# Altium PCB PCB.PcbDoc (part 1 of 3)
Units mm, origin at the board's own origin, x right, y up, seen from the top; angles counter-clockwise.
Board outline 82.04 x 50.04 mm, 4 copper layers (Top Layer, Layer 1, Layer 2, Bottom Layer), stack 1.604 mm thick; 179 components, 140 nets, 1023 pads, 520 vias.
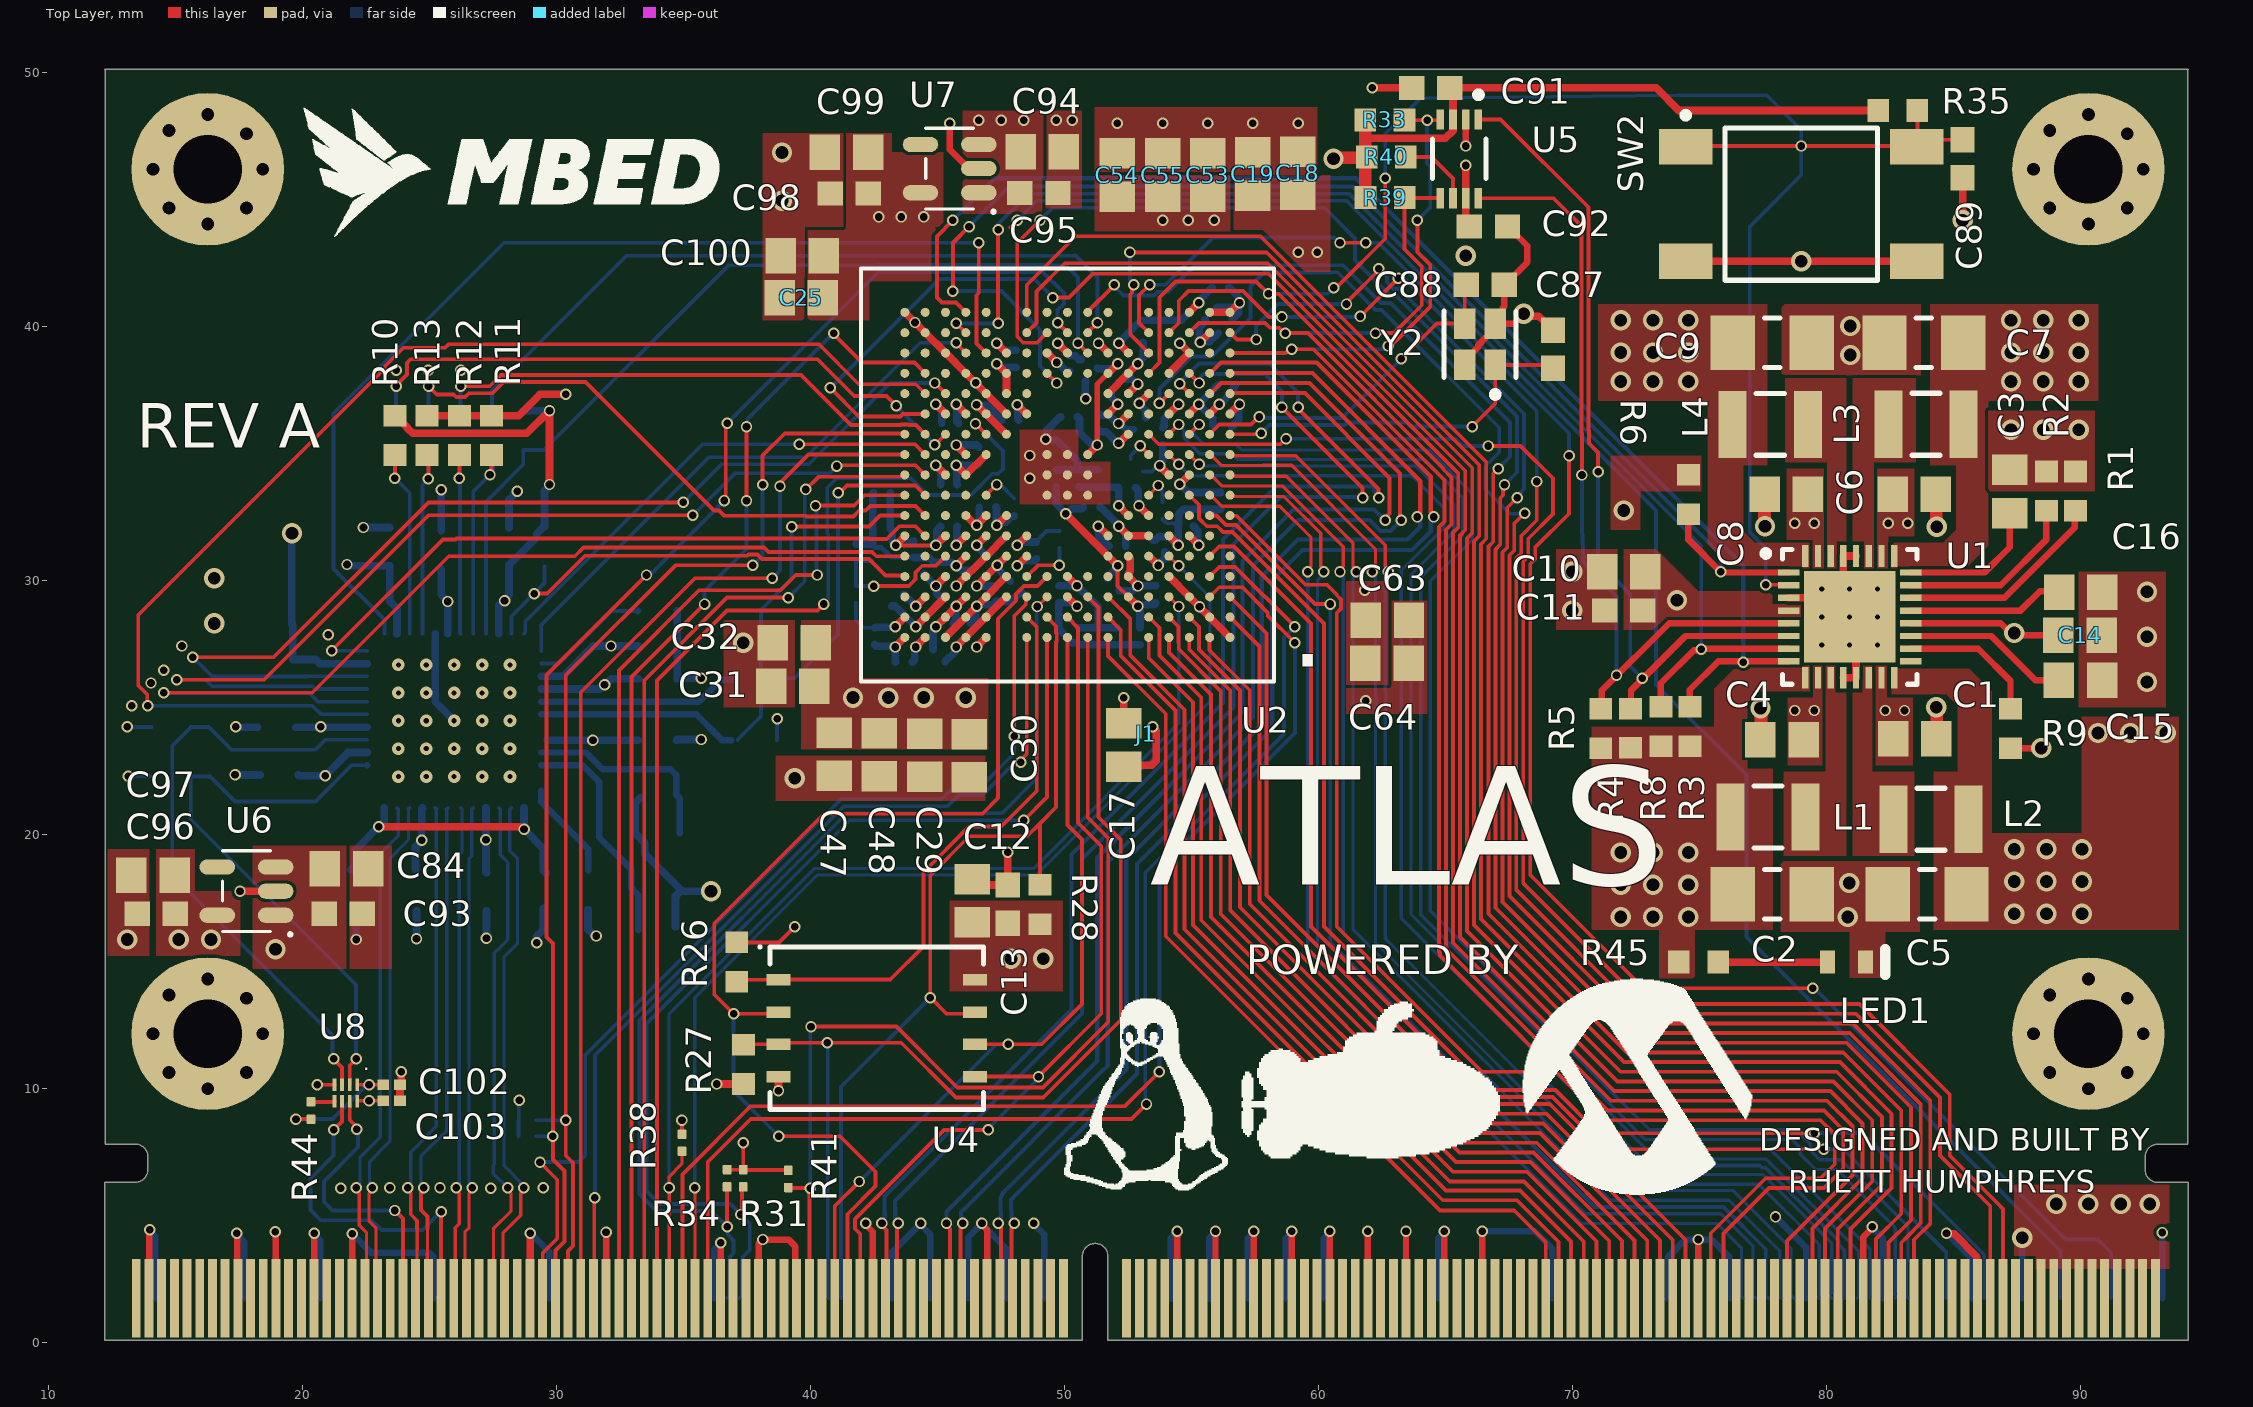
[diagram p0: Top Layer view]
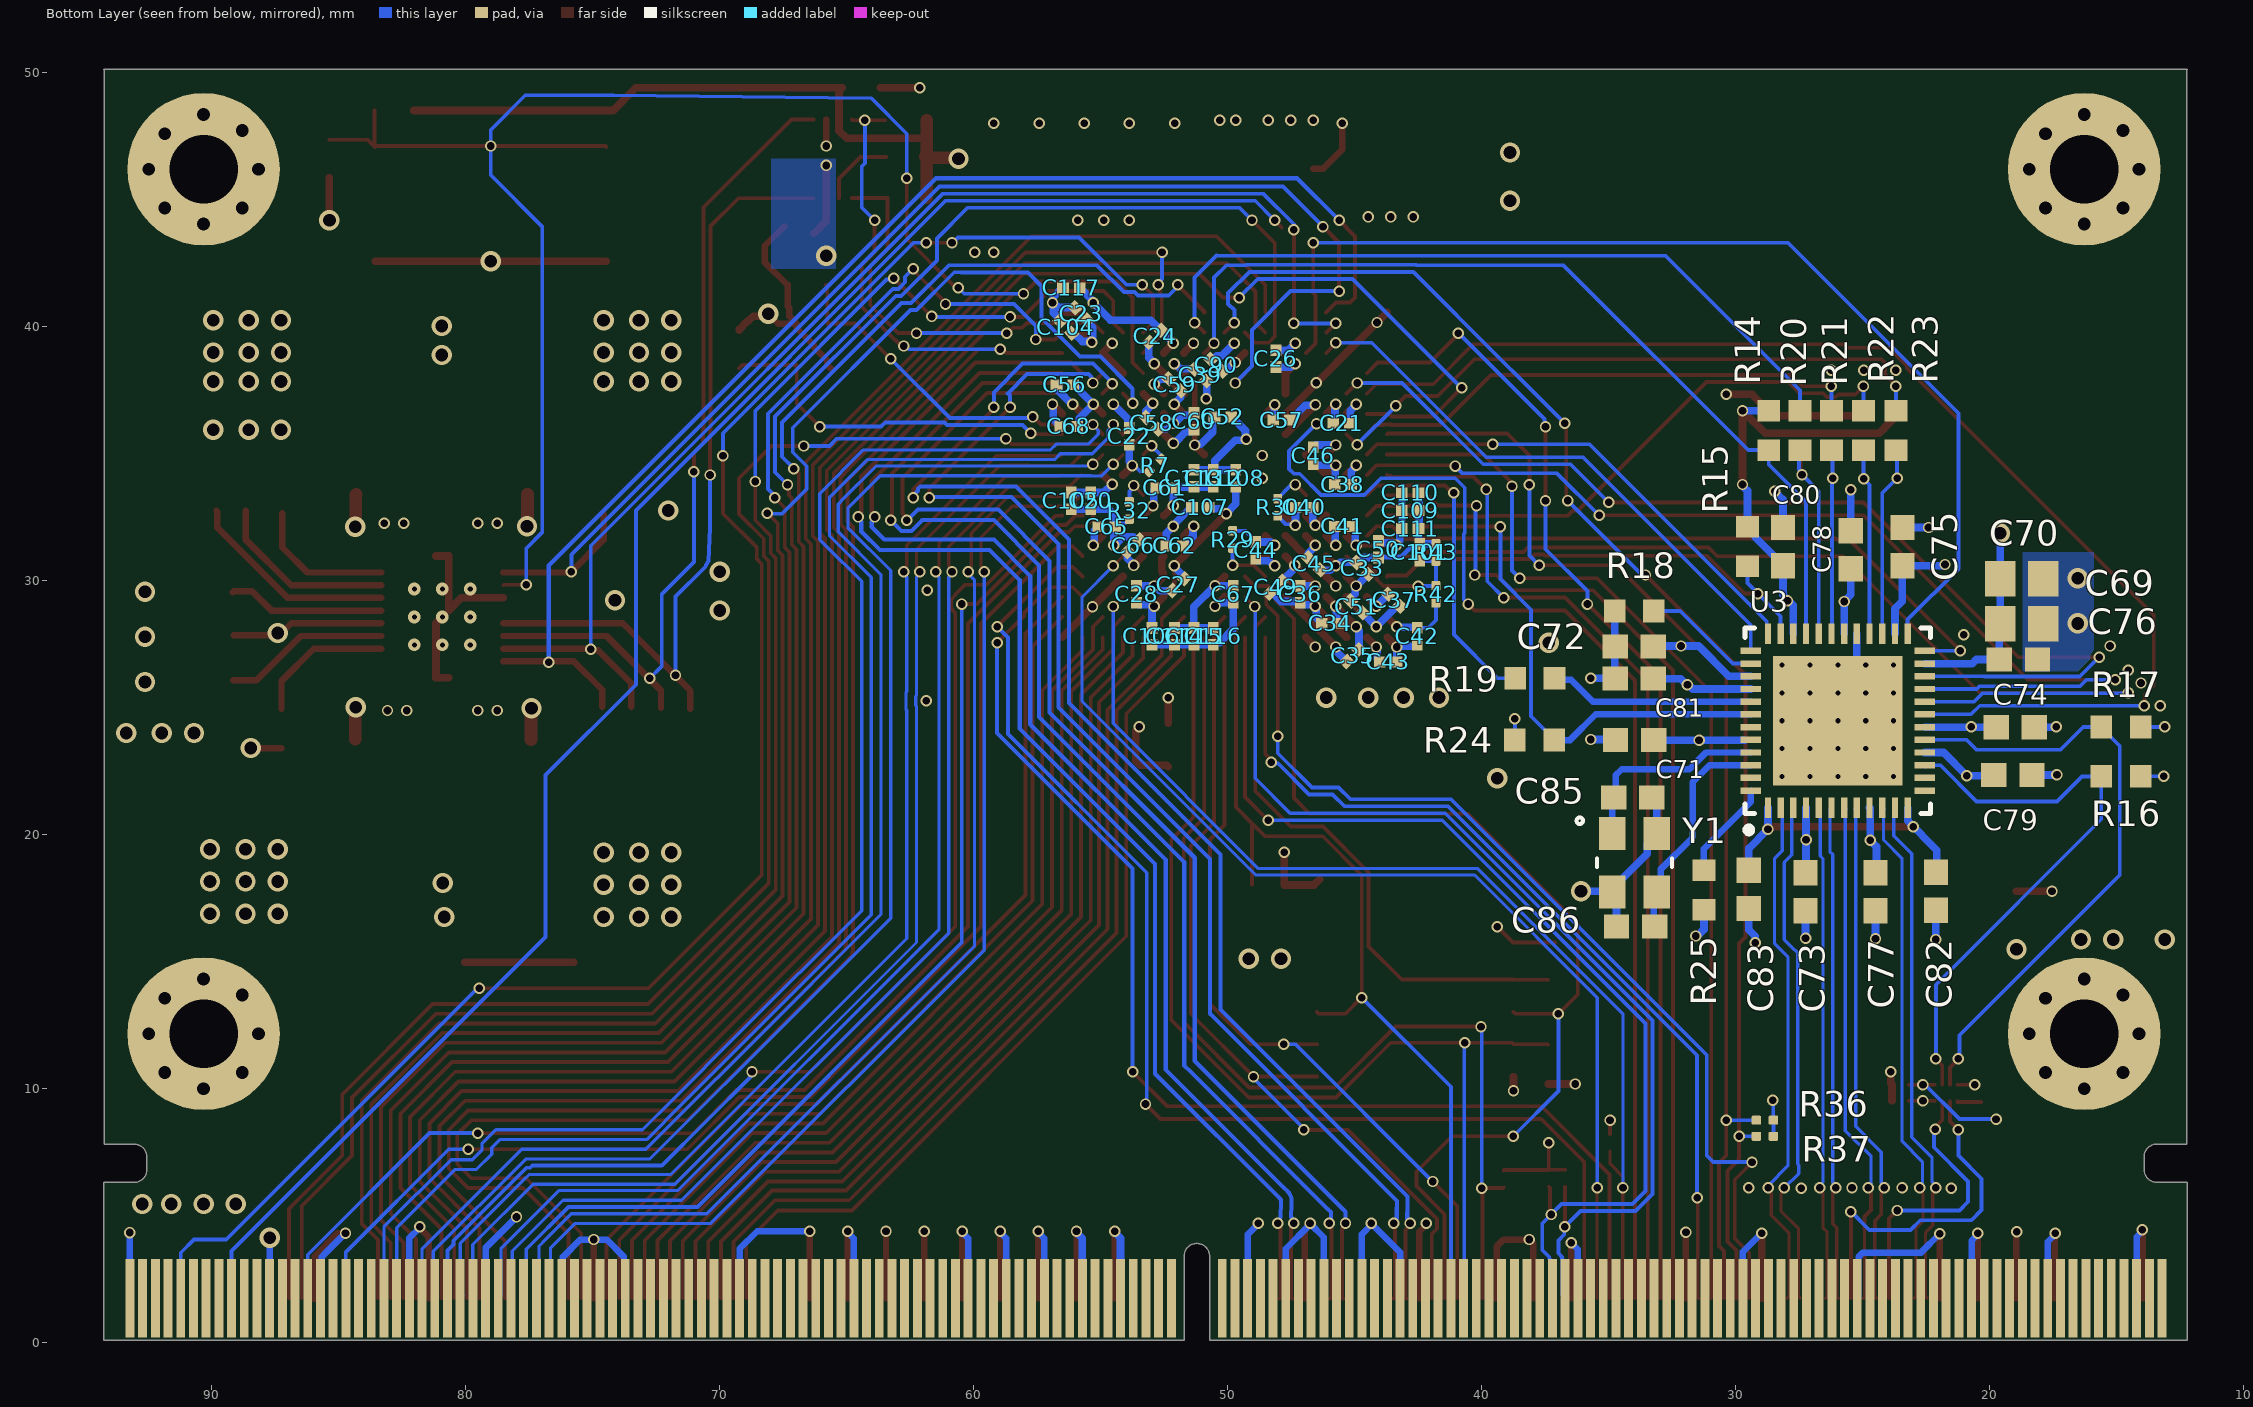
[diagram p1: Bottom Layer view, seen from below]
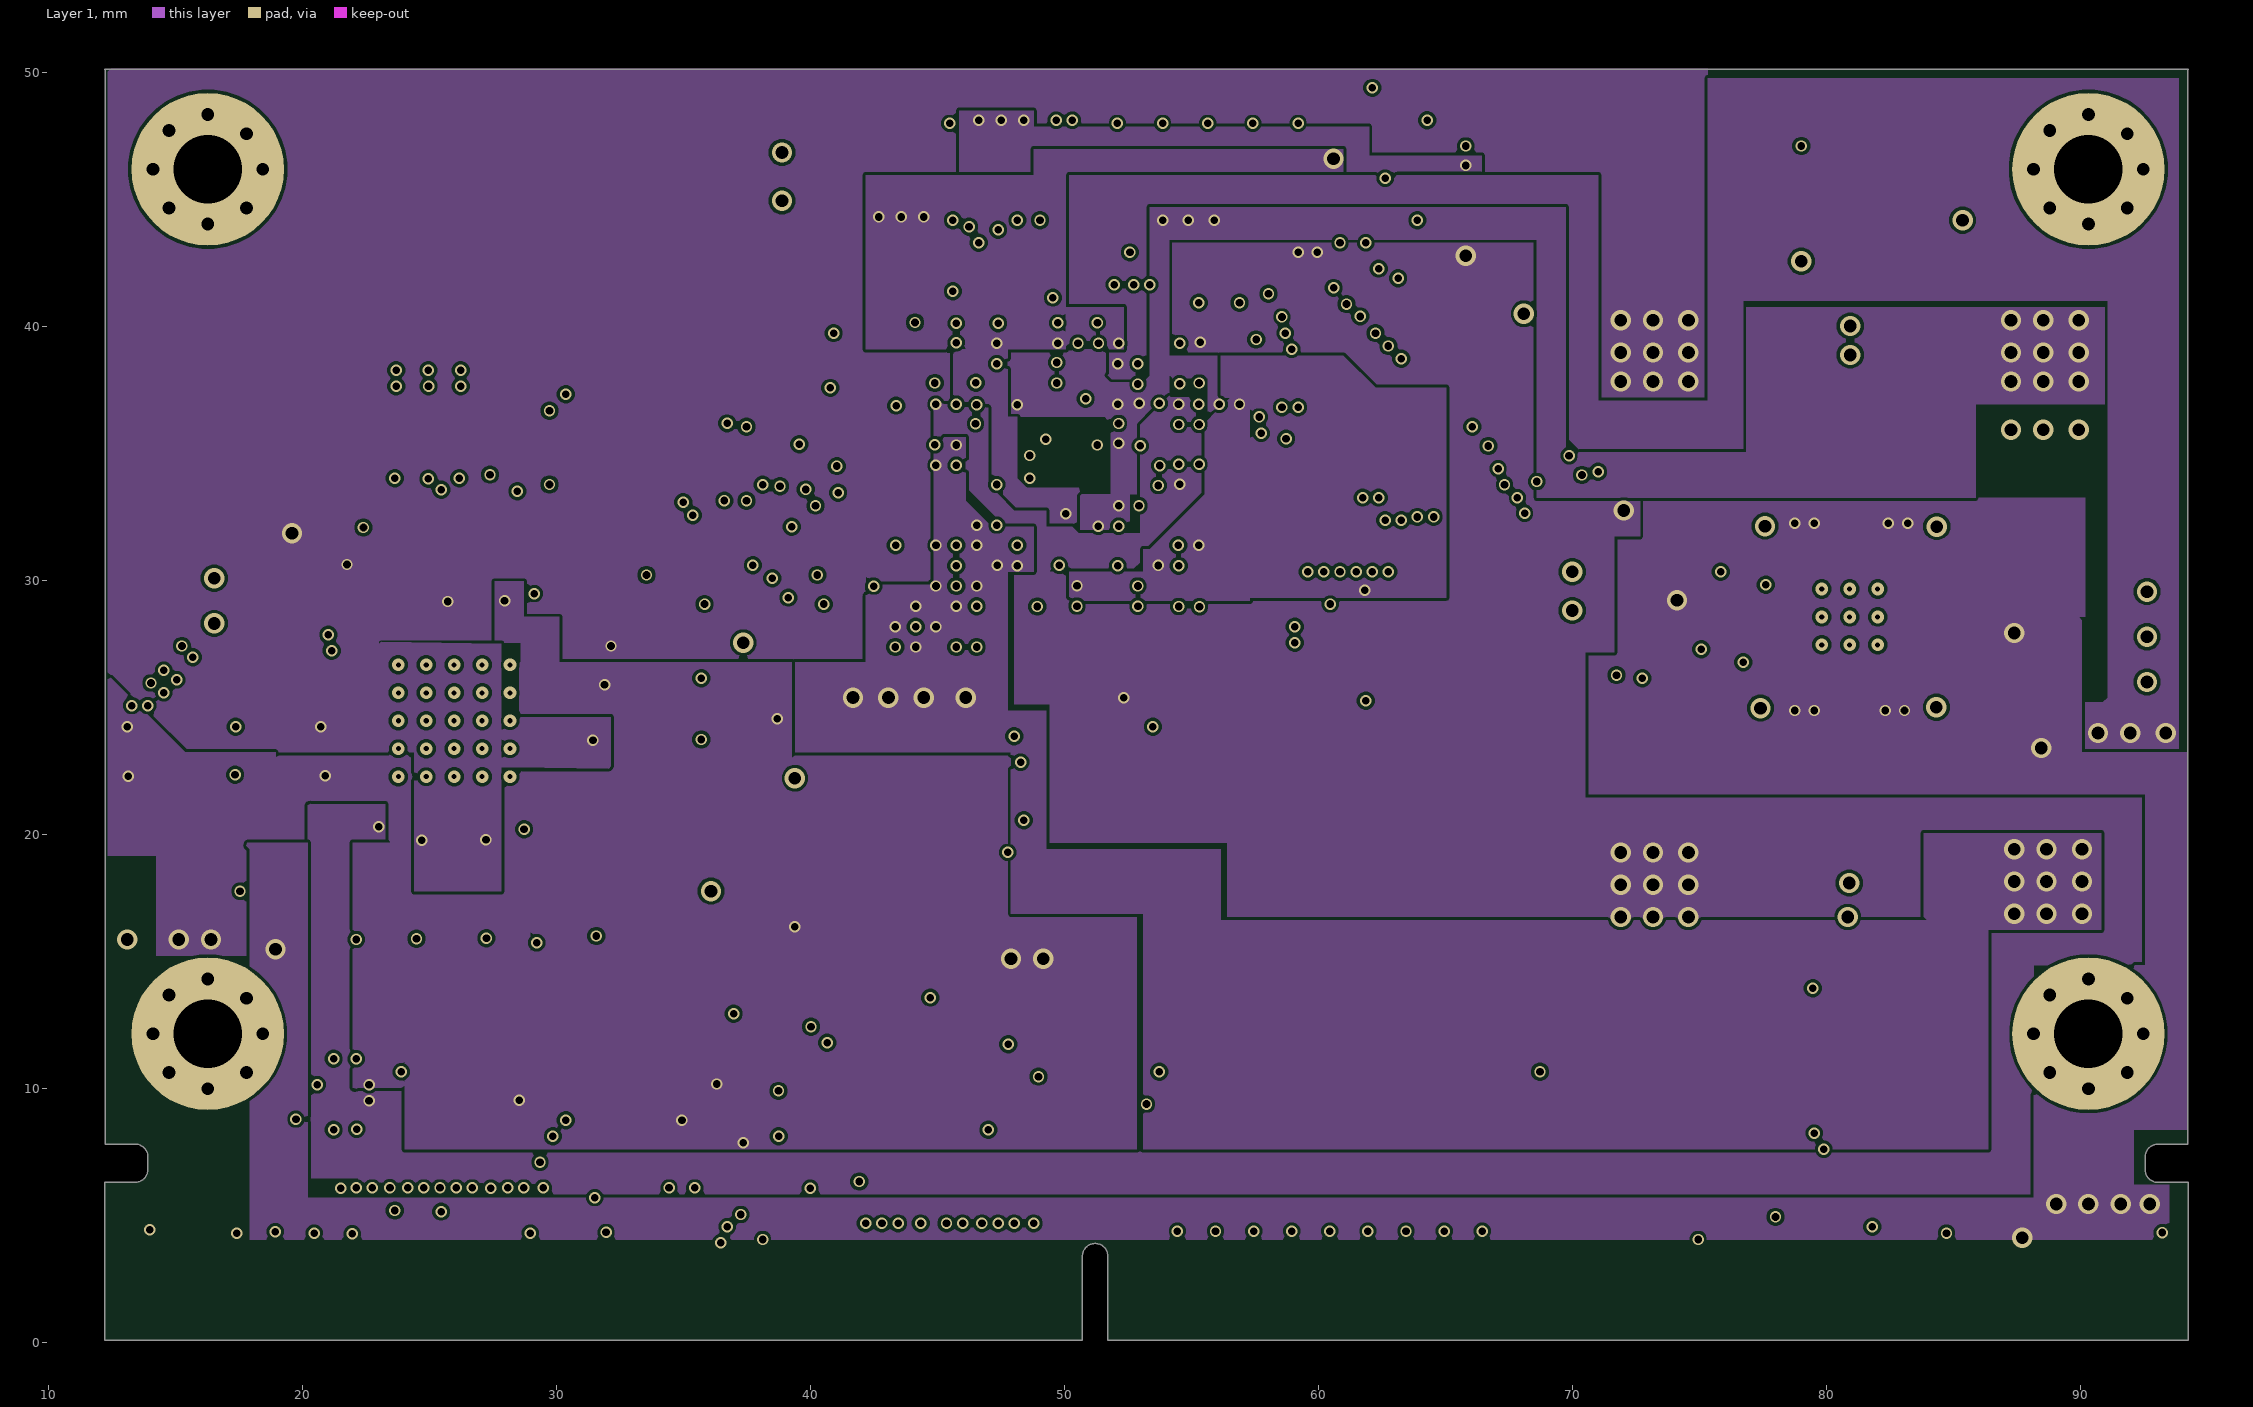
[diagram p2: Layer 1]
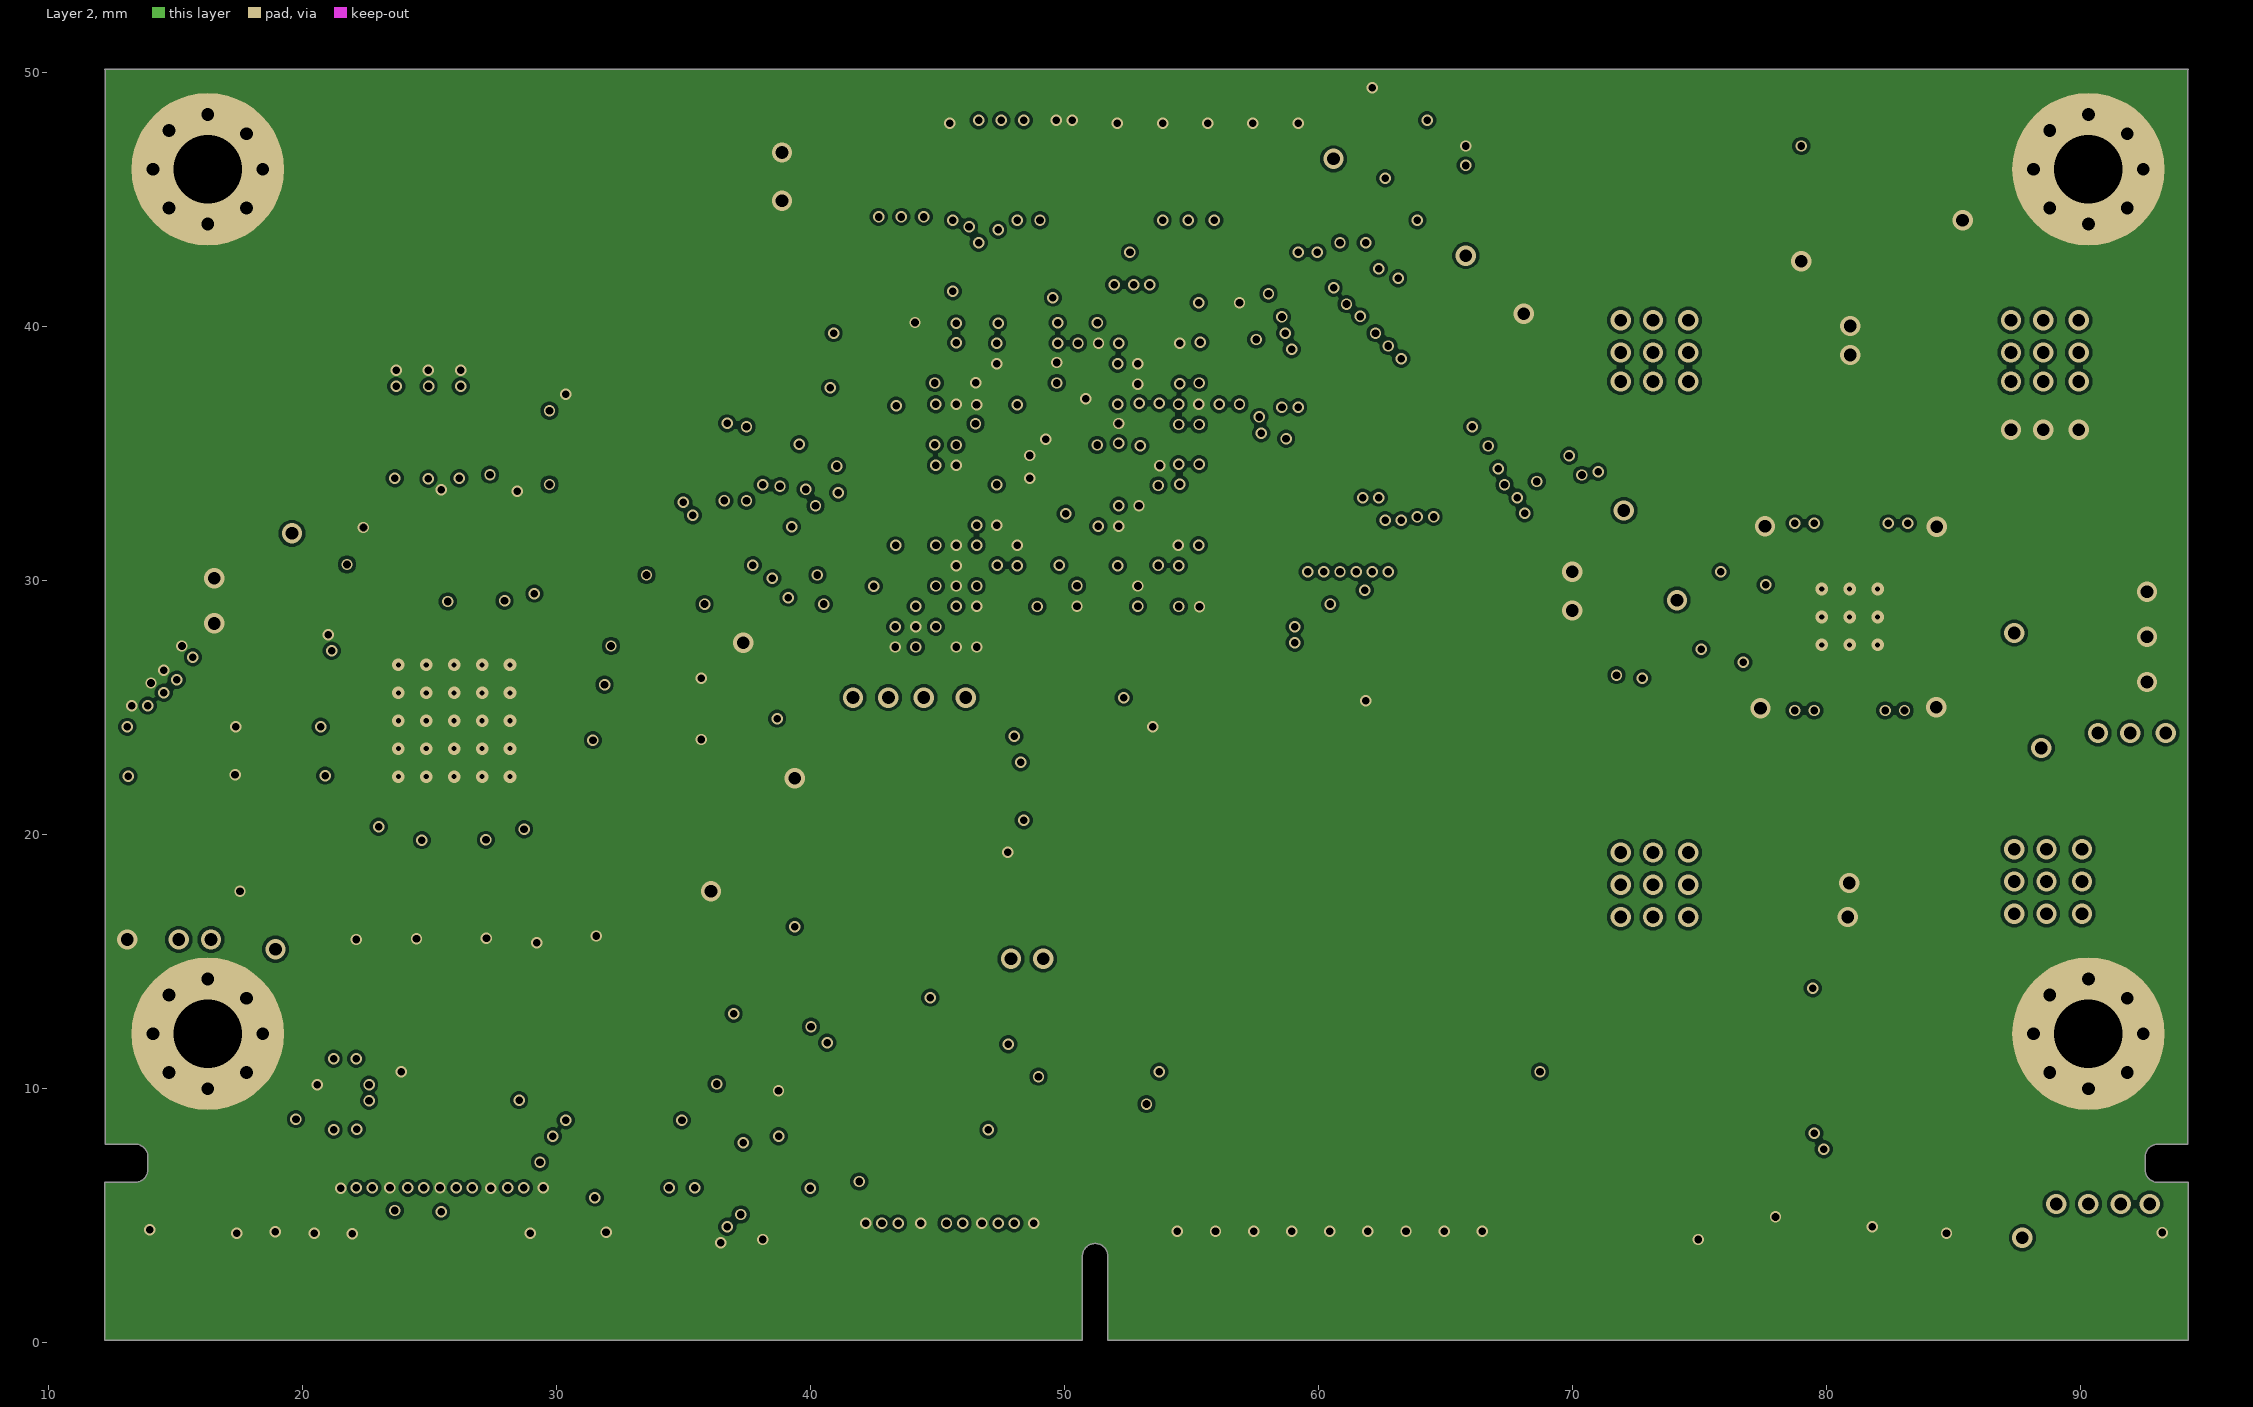
[diagram p3: Layer 2]
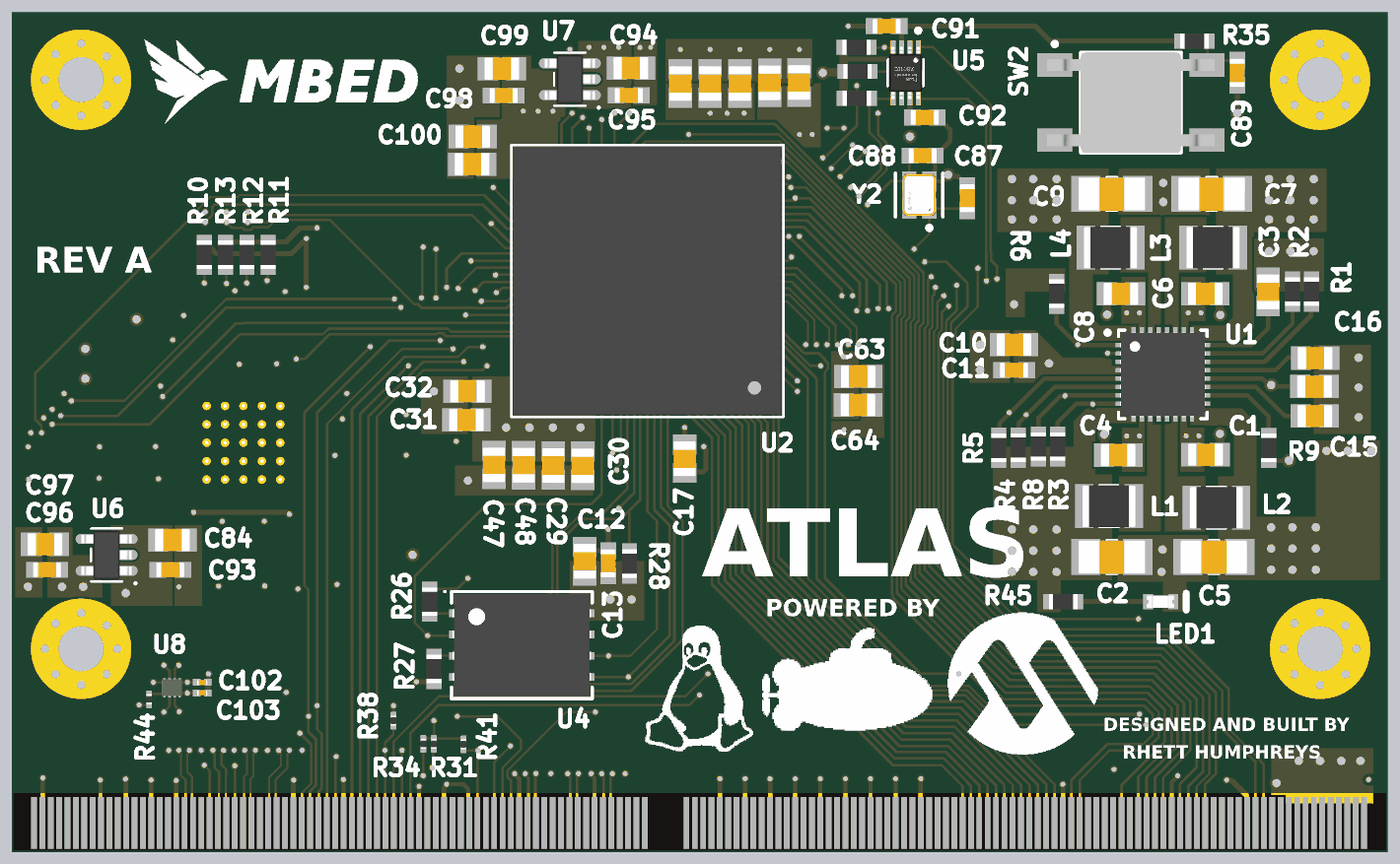
[diagram p6: 3D render of the assembled board from above, using the file's embedded part models]
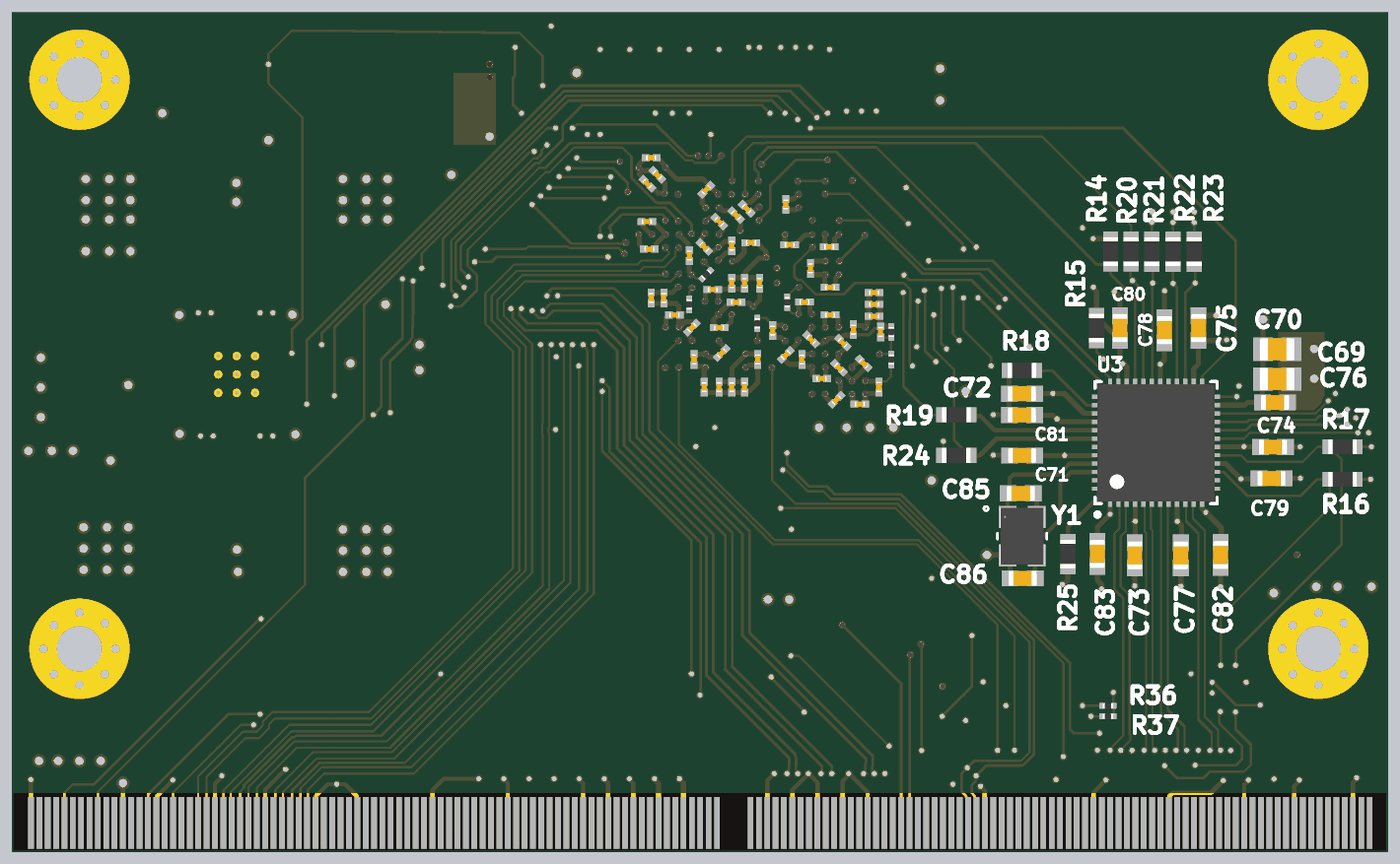
[diagram p7: 3D render of the assembled board from below, using the file's embedded part models]

## Layer stack, top to bottom
Top Solder: solder mask 0.0102, Solder Resist, Dk 3.5
Top Layer: signal copper 0.035
Dielectric 2: prepreg 0.0994, PP-006, Dk 4.1
Layer 1: signal copper 0.035
Dielectric 1: dielectric 1.265, FR-4, Dk 4.8
Layer 2: signal copper 0.035
Dielectric 3: prepreg 0.0994, PP-006, Dk 4.1
Bottom Layer: signal copper 0.035
Bottom Solder: solder mask 0.0102, Solder Resist, Dk 3.5

## Board outline
12.197,6.318 13.397,6.318 ccw(c13.397,6.819) 13.898,6.819 13.9,6.82 13.9,7.321 ccw(c13.398,7.321) 13.398,7.823 12.216,7.823 12.216,50.114 12.192,50.138 94.234,50.138 94.216,50.12 94.216,7.816 93.035,7.816 ccw(c93.035,7.314) 92.533,7.314 92.533,6.814 ccw(c93.035,6.814) 93.035,6.312 94.234,6.312 94.234,0.1 94.231,0.103 51.692,0.103 51.692,3.4 ccw(c51.192,3.41) 50.692,3.4 50.692,0.1 12.192,0.1

## Design rules (kind name [scope] priority, off if disabled: settings)
Clearance [All] p1: gap=0.125 ignorepadtopadclearanceinfootprint=FALSE
DiffPairsRouting USBHS_PAIRS [InDifferentialPairClass('USBHS_PAIRS')] p1: maxlimit=0.254 minlimit=0.254 mostfreqgap=0.254 toplayer_minwidth=0.16 toplayer_maxwidth=0.381 toplayer_prefwidth=0.16 midlayer1_minwidth=0.16 midlayer1_maxwidth=0.381 midlayer1_prefwidth=0.16 midlayer2_minwidth=0.16 midlayer2_maxwidth=0.381 midlayer2_prefwidth=0.16 bottomlayer_minwidth=0.16 bottomlayer_maxwidth=0.381 bottomlayer_prefwidth=0.16 maxuncoupledlength=12.7
DiffPairsRouting ETH_MDI_PAIRS_1 [InDifferentialPairClass('ETH_MDI_PAIRS')] p2: maxlimit=1 minlimit=0.25 mostfreqgap=0.254 toplayer_minwidth=0.125 toplayer_maxwidth=0.381 toplayer_prefwidth=0.128 midlayer1_minwidth=0.125 midlayer1_maxwidth=0.381 midlayer1_prefwidth=0.128 midlayer2_minwidth=0.125 midlayer2_maxwidth=0.381 midlayer2_prefwidth=0.128 bottomlayer_minwidth=0.125 bottomlayer_maxwidth=0.381 bottomlayer_prefwidth=0.128 maxuncoupledlength=12.7
DiffPairsRouting [All] p3: maxlimit=0.254 minlimit=0.254 mostfreqgap=0.254 toplayer_minwidth=0.1 toplayer_maxwidth=0.381 toplayer_prefwidth=0.381 midlayer1_minwidth=0.1 midlayer1_maxwidth=0.381 midlayer1_prefwidth=0.381 midlayer2_minwidth=0.1 midlayer2_maxwidth=0.381 midlayer2_prefwidth=0.381 bottomlayer_minwidth=0.1 bottomlayer_maxwidth=0.381 bottomlayer_prefwidth=0.381 maxuncoupledlength=12.7
HoleSize [All] p1: absolutevalues=TRUE maxlimit=10 minlimit=0.025 maxpercent=80.000 minpercent=20.000
MatchedLengths ETH_MDI_PAIRS [InNetClass('ETH_PHY_MDI_PAIRS')] p1: tolerance=25.4 checknetsindiffpair=TRUE checkdiffpairvsdiffpair=FALSE checkxsignals=FALSE checkothers=FALSE usedelayunits=TRUE delaytolerance=1000.000000
MinimumSolderMaskSliver [All] p1: minsoldermaskwidth=0.125
PolygonConnect [All] p1: connectstyle=Direct reliefconductorwidth=0.254 reliefentries=4 polygonreliefangle="90 Angle" airgapwidth=0.254
RoutingVias [All] p1: holewidth=0.711 width=1.27 viastyle="Through Hole" minholewidth=0.711 minwidth=1.27 maxholewidth=0.711 maxwidth=1.27
SilkToSolderMaskClearance [IsPad] p1: minsilkscreentomaskgap=0.125 clearancetoexposedcopper=TRUE
SolderMaskExpansion [All] p1: expansion=0 istentingtop=FALSE
SupplyNets "Schematic Supply Nets_12" [InNet('DDR_VREF')] p1: voltage=0.000
SupplyNets "Schematic Supply Nets_11" [InNet('MPU1V8')] p2: voltage=0.000
SupplyNets "Schematic Supply Nets_4" [InNet('VLDO1')] p3: voltage=0.000
SupplyNets "Schematic Supply Nets" [InNet('ETH1V8')] p4: voltage=0.000
SupplyNets "Schematic Supply Nets_10" [InNet('CORE1V15')] p5: voltage=0.000
SupplyNets "Schematic Supply Nets_9" [InNet('DDR1V35')] p6: voltage=0.000
SupplyNets "Schematic Supply Nets_8" [InNet('ETH1V15')] p7: voltage=0.000
SupplyNets "Schematic Supply Nets_7" [InNet('2V5')] p8: voltage=0.000
SupplyNets "Schematic Supply Nets_6" [InNet('5V')] p9: voltage=0.000
SupplyNets "Schematic Supply Nets_5" [InNet('GND')] p10: voltage=0.000
SupplyNets "Schematic Supply Nets_2" [InNet('3V3')] p11: voltage=0.000
SupplyNets "Schematic Supply Nets_1" [InNet('VLDO2')] p12: voltage=0.000
Width [All] p1: maxlimit=10 minlimit=0.1 preferedwidth=0.254
26 further rules are at their usual default settings.

## Classes and differential pairs
component class LDO: C84 C93 C94 C95 C96 C97 C98 C99 U6 U7
component class "Level Shifting": C91 C92 C102 C103 R33 R39 R40 R44 U5 U8
net class ETH_PHY_MDI_PAIRS: ETH_PHY_TXRX_A_N ETH_PHY_TXRX_A_P ETH_PHY_TXRX_B_N ETH_PHY_TXRX_B_P ETH_PHY_TXRX_C_N ETH_PHY_TXRX_C_P ETH_PHY_TXRX_D_N ETH_PHY_TXRX_D_P
net class USBHS: MPU_USBHS0_D_N MPU_USBHS0_D_P MPU_USBHS1_D_N MPU_USBHS1_D_P MPU_USBHS2_D_N MPU_USBHS2_D_P NetR7_2 NetU2_K5
net class MIPI_DSI_PAIRS: MPU_DSI_CLK_N MPU_DSI_CLK_P MPU_DSI_D0_N MPU_DSI_D0_P MPU_DSI_D1_N MPU_DSI_D1_P MPU_DSI_D2_N MPU_DSI_D2_P MPU_DSI_D3_N MPU_DSI_D3_P
net class ETH_PHY_MDIO: ETH_PHY_G125CK MPU_GMDC MPU_GMDIO MPU_GPIO_PB15 MPU_GRX0 MPU_GRX1 MPU_GRX2 MPU_GRX3 MPU_GRXCK MPU_GRXCTL MPU_GTX0 MPU_GTX1 MPU_GTX2 MPU_GTX3 MPU_GTXCK MPU_GTXCTL NetU2_A11 NetU2_C7
component class "SMARC Pinout-2": R36 R37 R38 R41
component class "SAM9X75 Pinout": C87 C88 C89 C101 C117 R7 R29 R30 R31 R32 R34 R35 R42 R43 SW2 Y2
component class Flash: C12 C13 R26 R27 R28 U4
component class "SMARC Pinout-1": J1
component class "SAM9X75 PWR": C17 C18 C19 C20 C21 C22 C23 C24 C25 C26 C27 C28 C29 C30 C31 C32 C33 C34 C35 C36 C37 C38 C39 C40 C41 C42 C43 C44 C45 C46 C47 C48 C49 C50 C51 C52 C53 C54 C55 C56 C57 C58 C59 C60 C61 C62 C63 C64 C65 C66 C67 C68 C90 C100 C104 C105 C106 C107 C108 C109 C110 C111 C112 C113 C114 C115 C116 U2
component class Ethernet: C69 C70 C71 C72 C73 C74 C75 C76 C77 C78 C79 C80 C81 C82 C83 C85 C86 R10 R11 R12 R13 R14 R15 R16 R17 R18 R19 R20 R21 R22 R23 R24 R25 U3 Y1
component class PMIC: C1 C2 C3 C4 C5 C6 C7 C8 C9 C10 C11 C14 C15 C16 L1 L2 L3 L4 LED1 R1 R2 R3 R4 R5 R6 R8 R9 R45 U1
differential pair MPU_USBHS2_D: +MPU_USBHS2_D_P -MPU_USBHS2_D_N
differential pair MPU_USBHS1_D: +MPU_USBHS1_D_P -MPU_USBHS1_D_N
differential pair MPU_USBHS0_D: +MPU_USBHS0_D_P -MPU_USBHS0_D_N
differential pair MPU_DSI_D3: +MPU_DSI_D3_P -MPU_DSI_D3_N
differential pair MPU_DSI_D2: +MPU_DSI_D2_P -MPU_DSI_D2_N
differential pair MPU_DSI_D1: +MPU_DSI_D1_P -MPU_DSI_D1_N
differential pair MPU_DSI_D0: +MPU_DSI_D0_P -MPU_DSI_D0_N
differential pair MPU_DSI_CLK: +MPU_DSI_CLK_P -MPU_DSI_CLK_N
differential pair ETH_PHY_TXRX_D: +ETH_PHY_TXRX_D_P -ETH_PHY_TXRX_D_N
differential pair ETH_PHY_TXRX_C: +ETH_PHY_TXRX_C_P -ETH_PHY_TXRX_C_N
differential pair ETH_PHY_TXRX_B: +ETH_PHY_TXRX_B_P -ETH_PHY_TXRX_B_N
differential pair ETH_PHY_TXRX_A: +ETH_PHY_TXRX_A_P -ETH_PHY_TXRX_A_N

## Components (designator, comment, footprint, x,y, rotation, side; value= is the part's Value field where it differs from the comment)
C1 "4u7F" CAP-0805 83.456,23.782 r180 top
C2 "22uF" CAP-1206 77.851,17.653 r0 top
C3 "1uF" CAP-0805 87.197,33.513 r270 top
C4 "4u7F" CAP-0805 78.232,23.749 r0 top
C5 "22uF" CAP-1206 83.947,17.653 r180 top
C6 "4u7F" CAP-0805 83.439,33.401 r180 top
C7 "22uF" CAP-1206 83.82,39.37 r180 top
C8 "4u7F" CAP-0805 78.398,33.401 r0 top
C9 "22uF" CAP-1206 77.851,39.37 r0 top
C10 "1uF" CAP-0805 72.009,30.353 r0 top
C11 "100nF" CAP-0603 72.009,28.829 r0 top
C12 "1uF" CAP-0805 46.355,17.399 r270 top
C13 "100nF" CAP-0603 47.752,17.272 r270 top
C14 "4u7F" CAP-0805 89.968,27.853 r180 top
C15 "4u7F" CAP-0805 89.984,26.087 r180 top
C16 "4u7F" CAP-0805 90,29.547 r180 top
C17 "4u7F" CAP-0805 52.324,23.534 r90 top
C18 "1uF" CAP-0805 59.17,46.037 r270 top
C19 "1uF" CAP-0805 57.404,46.013 r270 top
C20 "100nF" CAP-0201 55.372,33.147 r90 bottom
C21 "100nF" CAP-0201 45.49,36.2 r180 bottom
C22 "100nF" CAP-0201 53.848,35.687 r90 bottom
C23 "100nF" CAP-0201 55.753,40.513 r225 bottom
C24 "100nF" CAP-0201 52.832,39.624 r135 bottom
C25 "1uF" CAP-0805 39.624,41.148 r0 top
C26 "100nF" CAP-0201 48.079,38.743 r90 bottom
C27 "100nF" CAP-0201 51.916,29.85 r135 bottom
C28 "100nF" CAP-0201 53.567,29.469 r270 bottom
C29 "4u7F" CAP-0805 44.479,23.126 r90 top
C30 "1uF" CAP-0805 46.228,23.114 r90 top
C31 "1uF" CAP-0805 39.284,25.851 r0 top
C32 "1uF" CAP-0805 39.343,27.564 r0 top
C33 "100nF" CAP-0201 44.677,30.485 r225 bottom
C34 "100nF" CAP-0201 45.947,28.326 r180 bottom
C35 "100nF" CAP-0201 45.058,27.056 r135 bottom
C36 "100nF" CAP-0201 47.117,29.464 r90 bottom
C37 "100nF" CAP-0201 43.428,29.236 r45 bottom
C38 "100nF" CAP-0201 45.439,33.787 r180 bottom
C39 "100nF" CAP-0201 51.054,38.1 r45 bottom
C40 "100nF" CAP-0201 46.963,32.898 r180 bottom
C41 "100nF" CAP-0201 45.439,32.136 r180 bottom
C42 "100nF" CAP-0201 42.518,27.818 r90 bottom
C43 "100nF" CAP-0201 43.661,26.802 r0 bottom
C44 "100nF" CAP-0201 48.868,31.196 r270 bottom
C45 "100nF" CAP-0201 46.567,30.661 r45 bottom
C46 "100nF" CAP-0201 46.609,34.925 r90 bottom
C47 "4u7F" CAP-0805 40.92,23.165 r90 top
C48 "1uF" CAP-0805 42.7,23.146 r90 top
C49 "100nF" CAP-0201 48.086,29.744 r135 bottom
C50 "100nF" CAP-0201 44.042,31.247 r90 bottom
C51 "100nF" CAP-0201 44.9,28.968 r45 bottom
C52 "100nF" CAP-0201 50.165,36.449 r0 bottom
C53 "4u7F" CAP-0805 55.626,45.974 r270 top
C54 "1uF" CAP-0805 52.07,45.974 r270 top
C55 "1uF" CAP-0805 53.848,45.974 r270 top
C56 "100nF" CAP-0201 56.388,37.719 r0 bottom
C57 "100nF" CAP-0201 47.852,36.327 r0 bottom
C58 "100nF" CAP-0201 52.959,36.195 r45 bottom
C59 "100nF" CAP-0201 52.063,37.712 r225 bottom
C60 "100nF" CAP-0201 51.308,36.271 r270 bottom
C61 "100nF" CAP-0201 52.451,33.655 r180 bottom
C62 "100nF" CAP-0201 52.07,31.369 r180 bottom
C63 "2u2F" CAP-0805 62.699,28.448 r180 top
C64 "1uF" CAP-0805 62.683,26.746 r180 top
C65 "100nF" CAP-0201 54.737,32.131 r0 bottom
C66 "100nF" CAP-0201 53.694,31.374 r315 bottom
C67 "100nF" CAP-0201 49.757,29.469 r90 bottom
C68 "100nF" CAP-0201 56.234,36.073 r0 bottom
C69 "1uF" CAP-0805 18.719,28.299 r0 bottom
C70 "1uF" CAP-0805 18.719,30.077 r0 bottom
C71 "100nF" CAP-0603 33.959,23.727 r180 bottom
C72 "100nF" CAP-0603 33.972,27.417 r180 bottom
C73 "100nF" CAP-0603 27.228,17.758 r90 bottom
C74 "100nF" CAP-0603 18.973,24.235 r0 bottom
C75 "100nF" CAP-0603 23.418,31.347 r270 bottom
C76 "100nF" CAP-0603 18.846,26.902 r0 bottom
C77 "100nF" CAP-0603 24.475,17.758 r90 bottom
C78 "100nF" CAP-0603 25.45,31.22 r270 bottom
C79 "100nF" CAP-0603 19.062,22.352 r0 bottom
C80 "100nF" CAP-0603 28.117,31.347 r270 bottom
C81 "100nF" CAP-0603 33.972,26.147 r180 bottom
C82 "100nF" CAP-0603 22.098,17.78 r90 bottom
C83 "100nF" CAP-0603 29.466,17.848 r90 bottom
C84 "1uF" CAP-0805 21.717,18.668 r180 top
C85 "10pF" CAP-0603 34.036,21.463 r0 bottom
C86 "10pF" CAP-0603 33.921,16.383 r180 bottom
C87 "10pF" CAP-0603 69.215,39.116 r270 top
C88 "10pF" CAP-0603 66.548,41.656 r180 top
C89 "100nF" CAP-0603 85.344,46.609 r270 top
C90 "100nF" CAP-0201 50.419,38.481 r45 bottom
C91 "100nF" CAP-0603 64.401,49.403 r0 top
C92 "100nF" CAP-0603 66.675,43.942 r180 top
C93 "100nF" CAP-0603 21.59,16.89 r180 top
C94 "1uF" CAP-0805 49.112,46.893 r180 top
C95 "100nF" CAP-0603 48.981,45.264 r180 top
C96 "100nF" CAP-0603 14.224,16.89 r0 top
C97 "1uF" CAP-0805 14.097,18.414 r0 top
C98 "100nF" CAP-0603 41.511,45.251 r0 top
C99 "1uF" CAP-0805 41.402,46.863 r0 top
C100 "1uF" CAP-0805 39.663,42.799 r0 top
C101 "100nF" CAP-0201 42.418,31.115 r270 bottom
C102 "100nF" CAP-0201 23.495,10.16 r180 top
C103 "100nF" CAP-0201 23.495,9.525 r180 top
C104 "100nF" CAP-0201 56.357,39.982 r225 bottom
C105 "100nF" CAP-0201 56.134,33.147 r90 bottom
C106 "100nF" CAP-0201 52.959,27.813 r90 bottom
C107 "100nF" CAP-0201 51.054,32.893 r180 bottom
C108 "100nF" CAP-0201 49.657,34.036 r270 bottom
C109 "100nF" CAP-0201 42.799,32.766 r0 bottom
C110 "100nF" CAP-0201 42.799,33.47 r0 bottom
C111 "100nF" CAP-0201 42.799,32.056 r0 bottom
C112 "100nF" CAP-0201 50.546,34.036 r270 bottom
C113 "100nF" CAP-0201 51.308,34.036 r270 bottom
C114 "100nF" CAP-0201 52.07,27.813 r90 bottom
C115 "100nF" CAP-0201 51.308,27.813 r90 bottom
C116 "100nF" CAP-0201 50.546,27.813 r90 bottom
C117 "100nF" CAP-0201 56.134,41.529 r180 bottom
J1 "SMARC Conn 314 Pin" "SMARC CONN 314 PIN" 12.192,0.1 r0 top locked
L1 "2u2H" IND-1210 77.683,20.692 r180 top
L2 "2u2H" IND-1210 84.098,20.611 r0 top
L3 "2u2H" IND-1210 83.899,36.162 r0 top
L4 "2u2H" IND-1210 77.771,36.16 r180 top
LED1 "0603 LED" "0603 LED" 80.772,14.986 r0 top
R1 "10k" RES-0603 89.789,33.528 r90 top
R2 "10k" RES-0603 88.646,33.528 r90 top
R3 "10k" RES-0603 74.608,24.258 r90 top
R4 "4k7" RES-0603 72.263,24.194 r270 top
R5 "4k7" RES-0603 71.1,24.184 r270 top
R6 "10k" RES-0603 74.549,33.401 r90 top
R7 "5.62k" RES-0201 52.832,34.544 r135 bottom
R8 "10k" RES-0603 73.465,24.258 r270 top
R9 "10k" RES-0603 87.229,24.179 r270 top
R10 "10k" RES-0603 23.622,35.726 r90 top
R11 "10k" RES-0603 27.432,35.726 r270 top
R12 "10k" RES-0603 26.162,35.726 r270 top
R13 "10k" RES-0603 24.892,35.726 r270 top
R14 "10k" RES-0603 28.675,35.921 r90 bottom
R15 "10k" RES-0603 29.514,31.347 r90 bottom
R16 "10k" RES-0603 14.81,22.302 r180 bottom
R17 "10k" RES-0603 14.81,24.247 r180 bottom
R18 "10k" RES-0603 33.972,28.814 r180 bottom
R19 "22R" RES-0603 37.886,26.16 r0 bottom
R20 "22R" RES-0603 27.452,35.921 r90 bottom
R21 "22R" RES-0603 26.212,35.919 r90 bottom
R22 "22R" RES-0603 24.942,35.919 r90 bottom
R23 "22R" RES-0603 23.672,35.919 r90 bottom
R24 "10k" RES-0603 37.896,23.727 r0 bottom
R25 "6k04" RES-0603 31.228,17.83 r90 bottom
R26 "4k7" RES-0603 37.084,14.986 r90 top
R27 "4k7" RES-0603 37.353,10.961 r270 top
R28 "4k7" RES-0603 49.022,17.259 r270 top
R29 "20k" RES-0201 49.784,31.623 r270 bottom
R30 "240R" RES-0201 48.006,32.893 r90 bottom
R31 "4k7" RES-0201 37.338,6.477 r90 top
R32 "4.02k" RES-0201 53.848,32.766 r90 bottom
R33 "10k" RES-0603 62.596,48.145 r180 top
R34 "4k7" RES-0201 36.703,6.477 r90 top
R35 "10k" RES-0603 82.791,48.514 r180 top
R36 "4k7" RES-0201 28.829,8.763 r180 bottom
R37 "4k7" RES-0201 28.829,8.128 r180 bottom
R38 "4k7" RES-0201 34.925,7.874 r90 top
R39 "10k" RES-0603 62.611,45.085 r180 top
R40 "10k" RES-0603 62.653,46.689 r180 top
R41 "4k7" RES-0201 39.112,6.449 r90 top
R42 "10k" RES-0201 41.783,29.464 r270 bottom
R43 "10k" RES-0201 41.783,31.115 r270 bottom
R44 "10k" RES-0201 20.32,9.144 r90 top
R45 "100R" RES-0603 74.943,14.986 r180 top
SW2 "FSM4JSMATR" TECO-FSM4JSMATR_V 78.994,44.831 r90 top
U1 "MCP16502TAB-E/S8B" MCP16502TAB-E/S8B 80.899,28.575 r0 top
U2 "SAM9X75D2GT" SAM9X75D 50.1,34.168 r180 top
U3 "KSZ9131RNX" KSZ9131RNXC-TR 25.958,24.489 r90 bottom
U4 "AS5F14G04SND-10LIN" AS5F34G04SNDA-08LIN 42.595,12.385 r0 top
U5 "TXS0102DCUR" FP-DCU0008A-MFG 65.532,46.609 r270 top
U6 "TLV77718PDBVR" TLV77718PDBVR 17.78,17.779 r180 top
U7 "TLV77718PDBVR" TLV77718PDBVR 45.466,46.228 r180 top
U8 "74LVCH2T45RA3-7" 74LVCH2T45RA3-7 21.244,10.16 r0 top
Y1 "ABM8G-25.000MHZ-18-D2Y-T" CRYSTAL_ABM8G_ABR 33.959,18.901 r180 bottom
Y2 "ABM10W-24.0000MHZ-6-B1U-T3" FP-ABM10W-MFG 66.344,39.309 r90 top

## Footprints (in the part's own frame and the unit in brackets; to place one, negate y for a bottom-side part, rotate by r counter-clockwise, add the part's x,y. Pads: shape width x height; smd on the part's side, far side on the other; paste and mask are expansions set on the pad)
74LVCH2T45RA3-7 [mm] "Level shifter bidirection 2 input"
  rect 0.15x0.5 smd: 1(0.9,0) 2(0.6,0) 3(0.3,0) 4(0,0) 5(0,-0.65) 6(0.3,-0.65) 7(0.6,-0.65) 8(0.9,-0.65)
  body extent -0.16,-0.81 1.04,0.19, height 0.45
"0603 LED" [mm]
  rect 0.6x0.9 smd: 1(-0.75,0) 2(0.75,0)
  silkscreen extent 1.52,-0.51 1.52,0.51, body extent -0.84,-0.37 0.81,0.36, height 0.68
AS5F34G04SNDA-08LIN [mm] "SON, 8-Leads, Body 6.00x8.00mm, Pitch 1.27mm, IPC Medium Density"
  rect 0.95x0.45 smd: 1(-3.87,1.905) 2(-3.87,0.635) 3(-3.87,-0.635) 4(-3.87,-1.905) 5(3.87,-1.905) 6(3.87,-0.635) 7(3.87,0.635) 8(3.87,1.905)
  silkscreen extent -4.65,-3.2 4.2,3.25, body extent -4.13,-3.05 4.13,3.05, height 0.8
CAP-0201 [mm] "Chip Capacitor, 2-Leads, Body 0.60x0.30mm, IPC Medium Density"
  rect 0.46x0.42 smd: 1(-0.33,0) 2(0.33,0)
  body extent -0.32,-0.17 0.32,0.17, height 0.33
CAP-0603 [mm] "Chip Capacitor, 2-Leads, Body 1.60x0.80mm, IPC Medium Density"
  rect 1x0.95 smd: 1(-0.75,0) 2(0.75,0)
  body extent -0.85,-0.45 0.85,0.45, height 0.9
CAP-0805 [mm] "Chip Capacitor, 2-Leads, Body 2.00x1.25mm, IPC Medium Density"
  rect 1.2x1.4 smd: 1(-0.85,0) 2(0.85,0)
  body extent -1.05,-0.67 1.05,0.67, height 0.95
CAP-1206 [mm] "Chip Capacitor, 2-Leads, Body 4.00x2.00mm, IPC Medium Density"
  rect 1.75x2.15 smd: 1(-1.55,0) 2(1.55,0)
  silkscreen extent -0.3,-0.98 0.3,0.97, body extent -2,-1 2,1, height 2
CRYSTAL_ABM8G_ABR [mm]
  rect 1.05x1.3 smd paste+0 mask+0: 1(-0.875,1.15) 2(-0.875,-1.15) 3(0.875,-1.15) 4(0.875,1.15)
  silkscreen extent -2.29,-0.18 1.47,1.78, body extent -1.35,-1.7 1.35,1.7, height 0.81
FP-ABM10W-MFG [mm]
  rect 1.2x0.85 smd paste+0 mask+0: 1(-0.812,-0.6) 2(0.813,-0.6) 3(0.813,0.6) 4(-0.812,0.6)
  silkscreen extent -2.1,-1.42 1.3,1.43, body extent -1.51,-1.15 1.51,1.15, height 0.25
FP-DCU0008A-MFG [mm]
  rect 0.8x0.3 smd paste-1000 mask+0: 1(-1.55,0.75) 2(-1.55,0.25) 3(-1.55,-0.25) 4(-1.55,-0.75) 5(1.55,-0.75) 6(1.55,-0.25) 7(1.55,0.25) 8(1.55,0.75)
  silkscreen extent -2.65,-1.05 0.77,1.05, body extent -2.05,-1.3 2.05,1.3, height 0.25
IND-1210 [mm] "Chip Inductor, 2-Leads, Body 3.20x2.50mm, IPC Medium Density"
  rect 1.1x2.64 smd: 1(-1.48,0) 2(1.48,0)
  silkscreen extent -0.55,-1.22 0.55,1.22, body extent -1.6,-1.25 1.6,1.25, height 1.2
KSZ9131RNXC-TR [mm] "QFN, 48-Leads, Body 7.00x7.00mm, Pitch 0.50mm, Thermal Pad 5.10x5.10mm, IPC Medium Density"
  rect 0.8x0.25 smd: 1(-3.425,2.75) 2(-3.425,2.25) 3(-3.425,1.75) 4(-3.425,1.25) 5(-3.425,0.75) 6(-3.425,0.25) 7(-3.425,-0.25) 8(-3.425,-0.75) 9(-3.425,-1.25) 10(-3.425,-1.75) 11(-3.425,-2.25) 12(-3.425,-2.75) 25(3.425,-2.75) 26(3.425,-2.25) 27(3.425,-1.75) 28(3.425,-1.25) 29(3.425,-0.75) 30(3.425,-0.25) 31(3.425,0.25) 32(3.425,0.75) 33(3.425,1.25) 34(3.425,1.75) 35(3.425,2.25) 36(3.425,2.75)
  rect 0.25x0.8 smd: 13(-2.75,-3.425) 14(-2.25,-3.425) 15(-1.75,-3.425) 16(-1.25,-3.425) 17(-0.75,-3.425) 18(-0.25,-3.425) 19(0.25,-3.425) 20(0.75,-3.425) 21(1.25,-3.425) 22(1.75,-3.425) 23(2.25,-3.425) 24(2.75,-3.425) 37(2.75,3.425) 38(2.25,3.425) 39(1.75,3.425) 40(1.25,3.425) 41(0.75,3.425) 42(0.25,3.425) 43(-0.25,3.425) 44(-0.75,3.425) 45(-1.25,3.425) 46(-1.75,3.425) 47(-2.25,3.425) 48(-2.75,3.425)
  rect 5.1x5.1 smd: 49(0,0)
  silkscreen extent -4.42,-3.65 3.65,3.65, body extent -3.5,-3.5 3.5,3.5, height 0.9
MCP16502TAB-E/S8B [mm] "QFN, 32-Leads, Body 5.00x5.00mm, Pitch 0.50mm, Thermal Pad 3.60x3.60mm, IPC Medium Density"
  rect 0.85x0.25 smd: 1(-2.4,1.75) 2(-2.4,1.25) 3(-2.4,0.75) 4(-2.4,0.25) 5(-2.4,-0.25) 6(-2.4,-0.75) 7(-2.4,-1.25) 8(-2.4,-1.75) 17(2.4,-1.75) 18(2.4,-1.25) 19(2.4,-0.75) 20(2.4,-0.25) 21(2.4,0.25) 22(2.4,0.75) 23(2.4,1.25) 24(2.4,1.75)
  rect 0.25x0.85 smd: 9(-1.75,-2.4) 10(-1.25,-2.4) 11(-0.75,-2.4) 12(-0.25,-2.4) 13(0.25,-2.4) 14(0.75,-2.4) 15(1.25,-2.4) 16(1.75,-2.4) 25(1.75,2.4) 26(1.25,2.4) 27(0.75,2.4) 28(0.25,2.4) 29(-0.25,2.4) 30(-0.75,2.4) 31(-1.25,2.4) 32(-1.75,2.4)
  rect 3.6x3.6 smd: 33(0,0)
  silkscreen extent -3.42,-2.65 2.65,2.65, body extent -2.55,-2.55 2.55,2.55, height 1
RES-0201 [mm] "Chip Resistor, 2-Leads, Body 0.60x0.30mm, IPC Medium Density"
  rrect25% 0.375x0.35 smd: 1(-0.337,0) 2(0.337,0)
  body extent -0.3,-0.15 0.3,0.15, height 0.2
RES-0603 [mm] "Chip Resistor, 2-Leads, Body 1.60x0.80mm, IPC Medium Density"
  rect 0.85x0.9 smd: 1(-0.775,0) 2(0.775,0)
  body extent -0.85,-0.45 0.85,0.45, height 0.5
SAM9X75D [mil]
  round 14 smd paste+0 mask+0: A1(-251.97,251.97) A2(-220.47,251.97) A3(-188.98,251.97) A4(-157.48,251.97) A5(-125.98,251.97) A7(-62.99,251.97) A8(-31.5,251.97) A9(0,251.97) A10(31.5,251.97) A11(62.99,251.97) A13(125.98,251.97) A14(157.48,251.97) A15(188.98,251.97) A16(220.47,251.97) A17(251.97,251.97) B1(-251.97,220.47) B2(-220.47,220.47) B3(-188.98,220.47) B4(-157.48,220.47) B5(-125.98,220.47) B7(-62.99,220.47) B8(-31.5,220.47) B9(0,220.47) B10(31.5,220.47) B11(62.99,220.47) B13(125.98,220.47) B14(157.48,220.47) B15(188.98,220.47) B16(220.47,220.47) B17(251.97,220.47) C1(-251.97,188.98) C2(-220.47,188.98) C3(-188.98,188.98) C4(-157.48,188.98) C5(-125.98,188.98) C6(-94.49,188.98) C7(-62.99,188.98) C8(-31.5,188.98) C9(0,188.98) C10(31.5,188.98) C11(62.99,188.98) C12(94.49,188.98) C13(125.98,188.98) C14(157.48,188.98) C15(188.98,188.98) C16(220.47,188.98) C17(251.97,188.98) D1(-251.97,157.48) D2(-220.47,157.48) D3(-188.98,157.48) D4(-157.48,157.48) D5(-125.98,157.48) D6(-94.49,157.48) D7(-62.99,157.48) D8(-31.5,157.48) D9(0,157.48) D10(31.5,157.48) D11(62.99,157.48) D12(94.49,157.48) D13(125.98,157.48) D14(157.48,157.48) D15(188.98,157.48) D16(220.47,157.48) D17(251.97,157.48) E1(-251.97,125.98) E2(-220.47,125.98) E3(-188.98,125.98) E4(-157.48,125.98) E5(-125.98,125.98) E6(-94.49,125.98) E7(-62.99,125.98) E11(62.99,125.98) E12(94.49,125.98) E13(125.98,125.98) E14(157.48,125.98) E15(188.98,125.98) E16(220.47,125.98) E17(251.97,125.98) F2(-220.47,94.49) F3(-188.98,94.49) F4(-157.48,94.49) F5(-125.98,94.49) F6(-94.49,94.49) F7(-62.99,94.49) F11(62.99,94.49) F12(94.49,94.49) F13(125.98,94.49) F14(157.48,94.49) F15(188.98,94.49) F16(220.47,94.49) F17(251.97,94.49) G1(-251.97,62.99) G2(-220.47,62.99) G3(-188.98,62.99) G4(-157.48,62.99) G5(-125.98,62.99) G6(-94.49,62.99) G12(94.49,62.99) G13(125.98,62.99) G14(157.48,62.99) G15(188.98,62.99) G16(220.47,62.99) G17(251.97,62.99) H1(-251.97,31.5) H2(-220.47,31.5) H3(-188.98,31.5) H4(-157.48,31.5) H5(-125.98,31.5) H8(-31.5,31.5) H9(0,31.5) H10(31.5,31.5) H13(125.98,31.5) H14(157.48,31.5) H15(188.98,31.5) H16(220.47,31.5) H17(251.97,31.5) J1(-251.97,0) J2(-220.47,0) J3(-188.98,0) J4(-157.48,0) J8(-31.5,0) J9(0,0) J10(31.5,0) J14(157.48,0) J15(188.98,0) J16(220.47,0) J17(251.97,0) K1(-251.97,-31.5) K2(-220.47,-31.5) K3(-188.98,-31.5) K4(-157.48,-31.5) K5(-125.98,-31.5) K8(-31.5,-31.5) K9(0,-31.5) K10(31.5,-31.5) K13(125.98,-31.5) K14(157.48,-31.5) K15(188.98,-31.5) K16(220.47,-31.5) K17(251.97,-31.5) L1(-251.97,-62.99) L2(-220.47,-62.99) L3(-188.98,-62.99) L4(-157.48,-62.99) L5(-125.98,-62.99) L6(-94.49,-62.99) L12(94.49,-62.99) L13(125.98,-62.99) L14(157.48,-62.99) L15(188.98,-62.99) L16(220.47,-62.99) L17(251.97,-62.99) M1(-251.97,-94.49) M2(-220.47,-94.49) M3(-188.98,-94.49) M4(-157.48,-94.49) M5(-125.98,-94.49) M6(-94.49,-94.49) M7(-62.99,-94.49) M11(62.99,-94.49) M12(94.49,-94.49) M13(125.98,-94.49) M14(157.48,-94.49) M15(188.98,-94.49) M16(220.47,-94.49) N1(-251.97,-125.98) N2(-220.47,-125.98) N3(-188.98,-125.98) N4(-157.48,-125.98) N5(-125.98,-125.98) N6(-94.49,-125.98) N7(-62.99,-125.98) N11(62.99,-125.98) N12(94.49,-125.98) N13(125.98,-125.98) N14(157.48,-125.98) N15(188.98,-125.98) N16(220.47,-125.98) N17(251.97,-125.98) P1(-251.97,-157.48) P2(-220.47,-157.48) P3(-188.98,-157.48) P4(-157.48,-157.48) P5(-125.98,-157.48) P6(-94.49,-157.48) P7(-62.99,-157.48) P8(-31.5,-157.48) P9(0,-157.48) P10(31.5,-157.48) P11(62.99,-157.48) P12(94.49,-157.48) P13(125.98,-157.48) P14(157.48,-157.48) P15(188.98,-157.48) P16(220.47,-157.48) P17(251.97,-157.48) R1(-251.97,-188.98) R2(-220.47,-188.98) R3(-188.98,-188.98) R4(-157.48,-188.98) R5(-125.98,-188.98) R6(-94.49,-188.98) R7(-62.99,-188.98) R8(-31.5,-188.98) R9(0,-188.98) R10(31.5,-188.98) R11(62.99,-188.98) R12(94.49,-188.98) R13(125.98,-188.98) R14(157.48,-188.98) R15(188.98,-188.98) R16(220.47,-188.98) R17(251.97,-188.98) T1(-251.97,-220.47) T2(-220.47,-220.47) T3(-188.98,-220.47) T4(-157.48,-220.47) T5(-125.98,-220.47) T7(-62.99,-220.47) T8(-31.5,-220.47) T9(0,-220.47) T10(31.5,-220.47) T11(62.99,-220.47) T13(125.98,-220.47) T14(157.48,-220.47) T15(188.98,-220.47) T16(220.47,-220.47) T17(251.97,-220.47) U1(-251.97,-251.97) U2(-220.47,-251.97) U3(-188.98,-251.97) U4(-157.48,-251.97) U5(-125.98,-251.97) U7(-62.99,-251.97) U8(-31.5,-251.97) U9(0,-251.97) U10(31.5,-251.97) U11(62.99,-251.97) U13(125.98,-251.97) U14(157.48,-251.97) U15(188.98,-251.97) U16(220.47,-251.97) U17(251.97,-251.97)
  silkscreen extent -320,-320 320,320, body extent -315,-315 315,315, height 48
"SMARC CONN 314 PIN" [mm]
  round 6 hole 2.7: 315(4.064,12.065) 315(4.064,46.101) 315(78.105,12.065) 315(78.105,46.101)
  rect 0.35x3.1 smd mask+0: P1(1.25,1.651) P2(1.75,1.651) P3(2.25,1.651) P4(2.75,1.651) P5(3.25,1.651) P6(3.75,1.651) P7(4.25,1.651) P8(4.75,1.651) P9(5.25,1.651) P10(5.75,1.651) P11(6.25,1.651) P12(6.75,1.651) P13(7.25,1.651) P14(7.75,1.651) P15(8.25,1.651) P16(8.75,1.651) P17(9.25,1.651) P18(9.75,1.651) P19(10.25,1.651) P20(10.75,1.651) P21(11.25,1.651) P22(11.75,1.651) P23(12.25,1.651) P24(12.75,1.651) P25(13.25,1.651) P26(13.75,1.651) P27(14.25,1.651) P28(14.75,1.651) P29(15.25,1.651) P30(15.75,1.651) P31(16.25,1.651) P32(16.75,1.651) P33(17.25,1.651) P34(17.75,1.651) P35(18.25,1.651) P36(18.75,1.651) P37(19.25,1.651) P38(19.75,1.651) P39(20.25,1.651) P40(20.75,1.651) P41(21.25,1.651) P42(21.75,1.651) P43(22.25,1.651) P44(22.75,1.651) P45(23.25,1.651) P46(23.75,1.651) P47(24.25,1.651) P48(24.75,1.651) P49(25.25,1.651) P50(25.75,1.651) P51(26.25,1.651) P52(26.75,1.651) P53(27.25,1.651) P54(27.75,1.651) P55(28.25,1.651) P56(28.75,1.651) P57(29.25,1.651) P58(29.75,1.651) P59(30.25,1.651) P60(30.75,1.651) P61(31.25,1.651) P62(31.75,1.651) P63(32.25,1.651) P64(32.75,1.651) P65(33.25,1.651) P66(33.75,1.651) P67(34.25,1.651) P68(34.75,1.651) P69(35.25,1.651) P70(35.75,1.651) P71(36.25,1.651) P72(36.75,1.651) P73(37.25,1.651) P74(37.75,1.651) P75(40.239,1.651) P76(40.739,1.651) P77(41.239,1.651) P78(41.739,1.651) P79(42.239,1.651) P80(42.739,1.651) P81(43.239,1.651) P82(43.739,1.651) P83(44.239,1.651) P84(44.739,1.651) P85(45.239,1.651) P86(45.739,1.651) P87(46.239,1.651) P88(46.739,1.651) P89(47.239,1.651) P90(47.739,1.651) P91(48.239,1.651) P92(48.739,1.651) P93(49.239,1.651) P94(49.739,1.651) P95(50.239,1.651) P96(50.739,1.651) P97(51.239,1.651) P98(51.739,1.651) P99(52.239,1.651) P100(52.739,1.651) P101(53.239,1.651) P102(53.739,1.651) P103(54.239,1.651) P104(54.739,1.651) P105(55.239,1.651) P106(55.739,1.651) P107(56.239,1.651) P108(56.739,1.651) P109(57.239,1.651) P110(57.739,1.651) P111(58.239,1.651) P112(58.739,1.651) P113(59.239,1.651) P114(59.739,1.651) P115(60.239,1.651) P116(60.739,1.651) P117(61.239,1.651) P118(61.739,1.651) P119(62.239,1.651) P120(62.739,1.651) P121(63.239,1.651) P122(63.739,1.651) P123(64.239,1.651) P124(64.739,1.651) P125(65.239,1.651) P126(65.739,1.651) P127(66.239,1.651) P128(66.739,1.651) P129(67.239,1.651) P130(67.739,1.651) P131(68.239,1.651) P132(68.739,1.651) P133(69.239,1.651) P134(69.739,1.651) P135(70.239,1.651) P136(70.739,1.651) P137(71.239,1.651) P138(71.739,1.651) P139(72.239,1.651) P140(72.739,1.651) P141(73.239,1.651) P142(73.739,1.651) P143(74.239,1.651) P144(74.739,1.651) P145(75.239,1.651) P146(75.739,1.651) P147(76.239,1.651) P148(76.739,1.651) P149(77.239,1.651) P150(77.739,1.651) P151(78.239,1.651) P152(78.739,1.651) P153(79.239,1.651) P154(79.739,1.651) P155(80.239,1.651) P156(80.739,1.651)
  rect 0.35x3.1 smd far side mask+0: S1(1,1.65) S2(1.5,1.65) S3(2,1.65) S4(2.5,1.65) S5(3,1.65) S6(3.5,1.65) S7(4,1.65) S8(4.5,1.65) S9(5,1.65) S10(5.5,1.65) S11(6,1.65) S12(6.5,1.65) S13(7,1.65) S14(7.5,1.65) S15(8,1.65) S16(8.5,1.65) S17(9,1.65) S18(9.5,1.65) S19(10,1.65) S20(10.5,1.65) S21(11,1.65) S22(11.5,1.65) S23(12,1.65) S24(12.5,1.65) S25(13,1.65) S26(13.5,1.65) S27(14,1.65) S28(14.5,1.65) S29(15,1.65) S30(15.5,1.65) S31(16,1.65) S32(16.5,1.65) S33(17,1.65) S34(17.5,1.65) S35(18,1.65) S36(18.5,1.65) S37(19,1.65) S38(19.5,1.65) S39(20,1.65) S40(20.5,1.65) S41(21,1.65) S42(21.5,1.65) S43(22,1.65) S44(22.5,1.65) S45(23,1.65) S46(23.5,1.65) S47(24,1.65) S48(24.5,1.65) S49(25,1.65) S50(25.5,1.65) S51(26,1.65) S52(26.5,1.65) S53(27,1.65) S54(27.5,1.65) S55(28,1.65) S56(28.5,1.65) S57(29,1.65) S58(29.5,1.65) S59(30,1.65) S60(30.5,1.65) S61(31,1.65) S62(31.5,1.65) S63(32,1.65) S64(32.5,1.65) S65(33,1.65) S66(33.5,1.65) S67(34,1.65) S68(34.5,1.65) S69(35,1.65) S70(35.5,1.65) S71(36,1.65) S72(36.5,1.65) S73(37,1.65) S74(37.5,1.65) S75(38,1.65) S76(40.005,1.651) S77(40.505,1.651) S78(41.005,1.651) S79(41.505,1.651) S80(42.005,1.651) S81(42.505,1.651) S82(43.005,1.651) S83(43.505,1.651) S84(44.005,1.651) S85(44.505,1.651) S86(45.005,1.651) S87(45.505,1.651) S88(46.005,1.651) S89(46.505,1.651) S90(47.005,1.651) S91(47.505,1.651) S92(48.005,1.651) S93(48.505,1.651) S94(49.005,1.651) S95(49.505,1.651) S96(50.005,1.651) S97(50.505,1.651) S98(51.005,1.651) S99(51.505,1.651) S100(52.005,1.651) S101(52.505,1.651) S102(53.005,1.651) S103(53.505,1.651) S104(54.005,1.651) S105(54.505,1.651) S106(55.005,1.651) S107(55.505,1.651) S108(56.005,1.651) S109(56.505,1.651) S110(57.005,1.651) S111(57.505,1.651) S112(58.005,1.651) S113(58.505,1.651) S114(59.005,1.651) S115(59.505,1.651) S116(60.005,1.651) S117(60.505,1.651) S118(61.005,1.651) S119(61.505,1.651) S120(62.005,1.651) S121(62.505,1.651) S122(63.005,1.651) S123(63.505,1.651) S124(64.005,1.651) S125(64.505,1.651) S126(65.005,1.651) S127(65.505,1.651) S128(66.005,1.651) S129(66.505,1.651) S130(67.005,1.651) S131(67.505,1.651) S132(68.005,1.651) S133(68.505,1.651) S134(69.005,1.651) S135(69.505,1.651) S136(70.005,1.651) S137(70.505,1.651) S138(71.005,1.651) S139(71.505,1.651) S140(72.005,1.651) S141(72.505,1.651) S142(73.005,1.651) S143(73.505,1.651) S144(74.005,1.651) S145(74.505,1.651) S146(75.005,1.651) S147(75.505,1.651) S148(76.005,1.651) S149(76.505,1.651) S150(77.005,1.651) S151(77.505,1.651) S152(78.005,1.651) S153(78.505,1.651) S154(79.005,1.651) S155(79.505,1.651) S156(80.005,1.651) S157(80.505,1.651) S158(81.005,1.651)
TECO-FSM4JSMATR_V [mm] "SMD, 4-Leads, Body 6x6mm, Pitch 4.5mm"
  rect 1.4x2.1 smd: 1(2.25,4.55) 2(2.25,-4.55) 3(-2.25,4.55) 4(-2.25,-4.55)
  silkscreen extent -3,-3 3.62,4.67, body extent -3,-5 3,5, height 5.08
TLV77718PDBVR [mm] "SOT23, 5-Leads, Body 2.90x2.80mm, Pitch 0.95mm, IPC Medium Density"
  oval 1.4x0.6 smd: 1(-1.15,0.95) 2(-1.15,0) 3(-1.15,-0.95) 4(1.15,-0.95) 5(1.15,0.95)
  silkscreen extent -1.79,-1.59 0.94,1.76, body extent -1.5,-1.45 1.5,1.45, height 1.45

## Part data
C1 C3 C4 C6 C8 C10 C12 C14 C15 C16 C17 C18 C19 C25 C29 C30 C31 C32 C47 C48 C53 C54 C55 C63 C64 C69 C70 C84 C94 C97 C99 C100: library part CAP-0805, "Capacitor chip unpolarized. 0805"
C2 C5 C7 C9: library part CAP-1206, "Capacitor chip unpolarized. 1206"
C11 C13 C71 C72 C73 C74 C75 C76 C77 C78 C79 C80 C81 C82 C83 C85 C86 C87 C88 C89 C91 C92 C93 C95 C96 C98: library part CAP-0603, "Capacitor chip unpolarized. 0603"
C20 C21 C22 C23 C24 C26 C27 C28 C33 C34 C35 C36 C37 C38 C39 C40 C41 C42 C43 C44 C45 C46 C49 C50 C51 C52 C56 C57 C58 C59 C60 C61 C62 C65 C66 C67 C68 C90 C101 C102 C103 C104 C105 C106 C107 C108 C109 C110 C111 C112 C113 C114 C115 C116 C117: library part CAP-0201, "Capacitor chip upolarized. 0201"
L1 L2 L3 L4: library part IND-1210
R1 R2 R3 R4 R5 R6 R8 R9 R10 R11 R12 R13 R14 R15 R16 R17 R18 R19 R20 R21 R22 R23 R24 R25 R26 R27 R28 R33 R35 R39 R40 R45: library part RES-0603, "Resistor chip. 0603"
R7 R29 R30 R31 R32 R34 R36 R37 R38 R41 R42 R43 R44: library part RES-0201, "Resistor chip. 0201"
SW2: library part CMP-2000-07486-1, "Micro Miniature Push Button Switch FSM JSM, 50 mA, -35 to 85 degC, 4-Pin SMD, RoHS, Tape and Reel", Capacitance=0f, Case\/Package=SMD/SMT, Contact Current Rating=50mA, Contact Resistance=100mOhm, Manufacturer="TE Connectivity", Max Operating Temperature=85degC, Max Voltage Rating (DC)=12V, Min Operating Temperature=-35degC, Operating Force=160gf, Package Description="4-Pin Surface Mount Device, Body 6 x 6 mm, Pitch 4.5 mm", Package Quantity=1200, Voltage Rating (DC)=24V, Actuator Length=0.055inch, Actuator Material=Polyamide, Contact Material=CopperAlloy, Contact Plating=Silver, Current Rating=50mA, Datasheet URL=http://www.te.com/commerce/DocumentDelivery/DDEController?Action=showdoc&DocId=Customer+Drawing%7F2-1437565-7%7FV%7Fpdf%7FEnglish%7FENG_CD_2-1437565-7_V.pdf%7F4-1437565-2, Datasheet Version="Rev. V, 02/2015", Electrical Life=100000Cycles, Illumination Type=Illuminated, Manufacturer URL=http://www.te.com/, Mechanical Life=100000Cycles, Mount=SurfaceMount, Mounting Technology=SurfaceMount, Orientation=Straight, Package Reference=FSM4JSMATR, Packaging=TapeandReel, REACH SVHC=Unknown, RoHSCompliant=true, Switch Travel=0.25mm, Termination=GullWing, Throw Configuration=SPST
U1: "Microchip PMIC for SAM9X devices"
U2: "ARM9 SiP 2GBit Internal DDR3L"
U3: "Eth PHY Gigabit"
U4: library part AS5F34G04SNDA-08LIN, "FLASH SPI/QUAD 4GBIT"
U5: library part CMP-0859-00001-2, "IC TRNSLTR BIDIRECTIONAL US8", Ambient Temperature Range High=+85°C, Ambient Temperature Range Low=-40°C, Manufacturer="Texas Instruments", Max Junction Temp=+150°C, Max Supply Voltage=5.5V, Min Supply Voltage=1.65V, Nominal Supply Current=1-14.4uA, Package=DCU0008A, Temperature="-40°C to +85°C", Automotive=No, Category=IC, ComponentLink2Description=Datasheet, ComponentLink2URL=http://www.ti.com/lit/ds/symlink/txs0102.pdf, Data Rate=24Mbits/s, Device Class L1="Integrated Circuits (ICs)", Device Class L2="Logic ICs", Device Class L3="Voltage Level Shifters", Digikey Description="IC TRNSLTR BIDIRECTIONAL US8", Height=0.9mm, Lead Free=Yes, Logic Function Desc="Bidirectional Voltage-Level Translator", Manufacturer Part Number=TXS0102DCUR, Mouser Description="Translation - Voltage Levels 2-Bit Bi-Directional Voltage-Level-Trans", Number Of Circuits=1, Number Of Inputs=2, Number Of Outputs=2, Octopart=https://octopart.com/txs0102dcur-texas+instruments-5414308, RoHS=TRUE, Standoff Height=0mm, Temperature Range High=+85°C, Temperature Range Low=-40°C, V A Max=3.6V, V A Min=1.65V, V B Max=5.5V, V B Min=2.3V
U6 U7: "LDO 1.8V 1A"
U8: "Level shifter dual input bidirectional"
Y1: "Description", Manufacturer_Name=Abracon, Copyright="Copyright (C) 2026 Ultra Librarian. All rights reserved.", Manufacturer_Part_Number=ABM8G-25.000MHZ-18-D2Y-T, RefDes=RefDes, Type=Type
Y2: library part CMP-27762-005164-1, "Crystal 24MHz ±10ppm 6pF SMD-4 2.5mm x 2mm"

## Via types
v1: diameter 0.45, hole 0.3, Top Layer to Bottom Layer, tented both sides, 367 vias
v2: diameter 0.8, hole 0.5, Top Layer to Bottom Layer, tented both sides, 87 vias
v3: diameter 0.5, hole 0.2, Top Layer to Bottom Layer, 34 vias
v4: diameter 0.8, hole 0.5, Top Layer to Bottom Layer, 32 vias

## Nets (pads, with @x,y where several pads share a name; then routed paths per layer and width w, separated by ;. In a path a pad name is that pad's centre, name@x,y a point inside that pad or via, vN(x,y) a via of type N, cw(c..) or ccw(c..) an arc to the next point about the centre after c; other vN are vias at no path point)
2V5: C63.2 C64.2 C65.2 C66.2 C67.2 C68.2 C114.2 C115.2 C116.2 U2.D9 U2.E5 U2.F3 U2.M1 | length 8.9
  Top Layer w0.3: U2.D9@50.101,30.178 v1(50.477,29.803) ; U2.E5@53.301,30.978 v1@53.676,30.603 ; U2.F3@54.901,31.778 v1@55.276,31.403 ; U2.M1@56.5,36.568 v1(56.876,36.945)
  Bottom Layer w0.3: C67.2@49.757,29.799 49.759,29.801 50.476,29.801 v1(50.477,29.803) 51.308,28.972 C115.2@51.308,28.143 ; C116.2@50.546,28.143 C115.2@51.308,28.143 ; C114.2@52.07,28.143 C115.2@51.308,28.143 ; v1(53.677,30.603) 53.677,30.643 53.928,30.894 53.928,31.028 53.942,31.042 53.942,31.127 C66.2@53.928,31.141 ; C65.2@55.058,32.14 55.078,32.14 55.147,32.071 55.147,32.051 55.237,31.961 55.237,31.43 v1(55.266,31.401) ; C68.2@56.564,36.073 56.584,36.073 56.644,36.133 56.644,36.153 56.847,36.356 56.847,36.916 v1(56.876,36.945)
  other v1: 61.801,29.627
3V3: C2.1 C17.2 C18.2 C19.2 C20.2 C21.2 C22.2 C23.2 C82.2 C83.2 C92.2 C94.2 C95.2 C103.2 C104.2 C105.2 L1.2 R3.1 R4.2 R5.2 R6.2 R8.2 R45.2 U1.9 U2.J3 U2.M4 U2.M15 U2.T2 U3.1 U3.12 U5.7 U7.1 U7.3 U8.8 | length 24.4
  Top Layer w0.15: U8.8@22.144,9.51 22.144,9.525 C103.2@23.165,9.525
  Top Layer w0.3: v1(22.987,20.32) 28.563,20.32 28.668,20.215 v1(28.708,20.215) ; v1(44.924,36.944) U2.M15@45.3,36.568 ; C17.2@52.324,24.384 v1(52.324,25.4) ; U2.M4@54.1,36.568 v1(54.476,36.944) ; v1@54.525,33.793 U2.J3@54.9,34.168 U2.J3@54.9,34.153 ; v1(55.325,39.392) U2.T2@55.7,39.768 ; v1(65.782,46.351) U5.7@65.782,45.059 65.782,44.163 66.257,43.688 C92.2@66.282,43.688
  Bottom Layer w0.3: C82.2@21.894,18.623 22.058,18.787 22.058,19.397 23.208,20.547 U3.12@23.208,21.064 ; U3.1@28.708,21.064 v1(28.708,20.215) 29.466,19.457 C83.2@29.466,18.598 C83.2@29.581,18.483 ; v1(44.924,36.944) 44.924,36.935 45.16,36.699 C21.2@45.16,36.2 ; C22.2@53.848,36.017 53.908,36.077 53.908,36.376 v1(54.476,36.944) ; v1(54.523,33.804) 54.85,33.477 C20.2@55.372,33.477 C105.2@56.134,33.477 ; C23.2@55.52,40.28 55.52,40.195 55.296,39.971 55.296,39.421 v1(55.325,39.392) 55.354,39.421 55.711,39.421 C104.2@56.038,39.749
  other v1: 22.606,9.525 59.182,42.926 59.944,42.926 46.609,48.133 47.498,48.133 48.387,48.133
  other v2: 71.882,16.764 73.152,16.764 74.549,16.764 71.882,18.034 73.152,18.034 74.549,18.034 71.882,19.304 73.152,19.304 74.549,19.304 72.009,32.766 65.786,42.799
5V: C1.2 C4.2 C6.2 C8.2 C10.2 C11.2 C14.2 C84.2 C93.2 J1.P147 J1.P148 J1.P149 J1.P150 J1.P151 J1.P152 J1.P153 J1.P154 J1.P155 J1.P156 J1.S147 R9.2 U1.4 U1.10 U1.15 U1.20 U1.26 U1.31 U6.1 U6.3 | length 9.4
  Top Layer w0.254: U1.20@83.299,28.325 86.843,28.325 v2@87.228,27.94 ; R9.2@87.229,23.404 v2@88.356,23.404 ; v2(87.376,27.94) 87.463,27.853 C14.2@89.118,27.853
  Bottom Layer w0.254: J1.S147@87.697,1.751 v2(87.697,4.131)
  other v1: 78.74,24.892 79.502,24.892 82.296,24.892 83.058,24.892 78.74,32.258 79.502,32.258 82.423,32.258 83.185,32.258
  other v2: 89.027,5.461 90.297,5.461 91.567,5.461 92.71,5.461 18.923,15.494 88.438,23.419 74.099,29.237
CARRIER_PWN_ON: J1.S154 U2.T5 | length 71.5
  Top Layer w0.15: U2.T5@53.3,39.768 52.922,40.146 52.922,41.238 v1(53.34,41.656) ; v1(60.833,43.307) v1(61.849,43.307) ; v1(69.85,34.925) 69.85,32.639 68.516,31.305 68.516,30.855 68.325,30.664 68.325,18.416 72.781,13.96 v1(79.446,13.96)
  Bottom Layer w0.15: v1(53.34,41.656) 53.967,41.656 55.828,43.517 60.595,43.517 60.805,43.307 v1(60.833,43.307) ; v1(61.849,43.307) 62.349,43.307 69.85,35.806 v1(69.85,34.925) ; v1@79.502,13.97 89.408,4.064 90.678,4.064 91.197,3.545 J1.S154@91.197,1.751
CORE1V15: C7.1 C53.2 C54.2 C55.2 C56.2 C57.2 C58.2 C59.2 C60.2 C61.2 C62.2 C112.2 C113.2 L3.2 U1.25 U2.F7 U2.G6 U2.L6 U2.M2 U2.M7 U2.M11 U2.N5 | length 11.1
  Top Layer w0.3: v1@48.124,36.934 U2.M11@48.499,36.559 ; v1(51.318,32.151) U2.F7@51.7,31.768 ; U2.M7@51.7,36.568 v1(52.076,36.945) ; v1(52.114,35.409) U2.L6@52.489,35.785 ; v1@52.118,32.951 U2.G6@52.5,32.568 ; v1(52.925,36.992) U2.N5@53.3,37.368 ; U2.M2@55.7,36.568 v1(56.076,36.944)
  Bottom Layer w0.3: v1(48.123,36.934) 48.152,36.905 48.152,36.358 C57.2@48.182,36.327 ; C112.2@50.546,33.706 50.571,33.68 52.095,33.68 C61.2@52.121,33.655 52.119,33.653 v1(52.118,32.953) v1(52.118,32.953) ; C60.2@51.308,35.941 51.308,35.921 51.368,35.861 51.621,35.861 52.073,35.409 v1(52.114,35.409) ; v1(51.318,32.151) 51.346,32.122 51.346,31.743 51.72,31.369 C62.2@51.74,31.369 ; C59.2@51.83,37.479 51.815,37.464 51.815,37.38 51.83,37.365 51.83,37.231 52.076,36.985 v1(52.076,36.945) ; v1(52.925,36.992) 52.925,36.952 53.192,36.684 53.192,36.541 53.206,36.527 53.206,36.442 C58.2@53.192,36.428 ; v1(56.076,36.944) 56.112,36.944 56.638,37.47 56.638,37.659 56.698,37.719 C56.2@56.718,37.719
  other v1: 53.848,44.196 54.864,44.196 55.88,44.196
  other v2: 87.249,37.846 88.519,37.846 89.916,37.846 87.249,38.989 88.519,38.989 89.916,38.989 87.249,40.259 88.519,40.259 89.916,40.259
DDR1V35: C5.1 C29.2 C30.2 C31.2 C32.2 C33.2 C34.2 C35.2 C36.2 C37.2 C38.2 C39.2 C40.2 C41.2 C42.2 C43.2 C44.2 C45.2 C46.2 C47.2 C48.2 C49.2 C50.2 C51.2 C52.2 C109.2 C110.2 C111.2 L2.2 R42.2 U1.16 U2.A16 U2.B15 U2.B17 U2.C14 U2.C16 U2.D13 U2.D15 U2.E11 U2.E12 U2.F13 U2.F15 U2.F17 U2.G13 U2.G14 U2.J15 U2.K8 U2.K14 U2.P7 | length 33.8
  Top Layer w0.15: v1(43.335,31.391) 44.923,31.391 v1(44.925,31.392)
  Top Layer w0.2: v1(51.276,35.345) 51.276,37.744 U2.P7@51.7,38.168
  Top Layer w0.3: v1@43.325,28.193 U2.B17@43.7,28.568 ; v1(43.335,31.391) U2.F17@43.71,31.768 ; v1@44.125,27.393 U2.A16@44.5,27.768 ; v1@44.125,28.993 U2.C16@44.5,29.368 ; v1@44.925,28.193 U2.B15@45.3,28.568 v1(45.725,28.992) U2.C14@46.1,29.368 ; v1@44.925,29.793 U2.D15@45.3,30.168 ; v1(44.925,31.392) U2.F15@45.3,31.768 ; v1(44.924,34.544) U2.J15@45.3,34.168 ; v1(45.724,35.344) U2.K14@46.1,34.968 ; U2.G14@46.1,32.568 46.115,32.568 46.491,32.192 v1(46.525,32.192) ; v1(46.525,29.793) U2.D13@46.9,30.168 ; v1(46.525,31.392) U2.F13@46.9,31.768 ; v1(46.525,32.192) U2.G13@46.9,32.568 ; U2.D13@46.9,30.168 v1@47.325,30.592 ; v1@47.325,30.593 U2.E12@47.7,30.968 ; v1@48.125,30.593 U2.E11@48.5,30.968 ; U2.K8@50.9,34.968 v1(51.276,35.345) ; U2.P7@51.7,38.168 v1(52.076,38.545)
  Bottom Layer w0.15: R42.2@41.783,29.127 41.783,28.448 42.083,28.148 C42.2@42.518,28.148
  Bottom Layer w0.3: C42.2@42.518,28.148 42.54,28.17 43.303,28.17 v1(43.325,28.192) ; C111.2@43.129,32.056 C110.2@43.129,33.47 ; C111.2@43.149,32.056 43.209,31.996 43.209,31.558 43.335,31.432 v1(43.335,31.391) 43.375,31.391 43.481,31.497 43.982,31.497 44.042,31.557 C50.2@44.042,31.577 ; C37.2@43.661,29.469 43.661,29.463 44.125,28.999 v1(44.125,28.992) ; C43.2@43.991,26.802 44.011,26.802 44.071,26.862 44.071,26.882 44.096,26.907 44.096,27.364 v1(44.125,27.392) ; C33.2@44.444,30.252 44.455,30.252 44.914,29.792 v1(44.925,29.792) 44.954,29.764 44.954,29.495 45.148,29.301 45.148,29.216 C51.2@45.134,29.202 ; C35.2@44.825,27.29 44.811,27.304 44.811,28.038 44.925,28.152 v1(44.925,28.192) ; v1(44.924,34.544) 44.924,34.503 45.109,34.318 C38.2@45.109,33.787 ; v1(44.925,31.392) 44.954,31.421 44.954,31.981 45.029,32.056 45.029,32.076 45.089,32.136 C41.2@45.109,32.136 ; C34.2@45.617,28.326 45.636,28.326 45.696,28.386 45.696,28.964 v1(45.725,28.992) ; v1(45.724,35.344) 46.52,35.344 46.529,35.335 46.549,35.335 46.609,35.275 C46.2@46.609,35.255 ; v1(46.525,29.793) C36.2@47.117,29.794 ; v1(46.525,31.392) 46.525,31.352 46.8,31.077 46.8,31.008 46.814,30.993 46.814,30.909 C45.2@46.8,30.894 ; v1(46.525,32.192) 46.525,32.233 46.633,32.341 C40.2@46.633,32.898 ; v1(47.344,30.612) 47.373,30.584 47.373,30.457 C49.2@47.852,29.977 ; v1(48.125,30.592) 48.166,30.592 48.36,30.786 48.808,30.786 48.868,30.846 C44.2@48.868,30.866 ; C52.2@50.495,36.449 50.515,36.449 50.575,36.389 50.575,35.845 51.047,35.373 51.247,35.373 v1(51.276,35.345) ; C39.2@51.287,38.364 51.304,38.347 51.838,38.347 52.035,38.545 v1(52.076,38.545)
  other v2: 87.376,16.891 88.646,16.891 90.043,16.891 87.376,18.161 88.646,18.161 90.043,18.161 87.376,19.431 88.646,19.431 90.043,19.431 90.678,24.003 91.948,24.003 93.345,24.003 41.656,25.4 43.053,25.4 44.45,25.4 46.101,25.4
DDR_VREF: C101.2 R42.1 R43.2 U2.E15 | length 5.8
  Top Layer w0.15: v1@42.472,29.791 43.857,29.791 44.123,30.056 44.123,30.325 44.388,30.591 44.922,30.591 U2.E15@45.3,30.968
  Bottom Layer w0.15: C101.2@42.418,30.785 42.411,30.778 R43.2@41.783,30.778 R42.1@41.783,29.801 41.789,29.796 42.467,29.796 v1(42.472,29.79)